# Altium PCB 400926.PcbDoc (part 1 of 7)
Units mm, origin at the board's own origin, x right, y up, seen from the top; angles counter-clockwise.
Board outline 148.5 x 63.5 mm, 4 copper layers (Top Layer, Mid-Layer 1, Mid-Layer 2, Bottom Layer), stack 1.514 mm thick; 311 components, 281 nets, 1495 pads, 2232 vias.
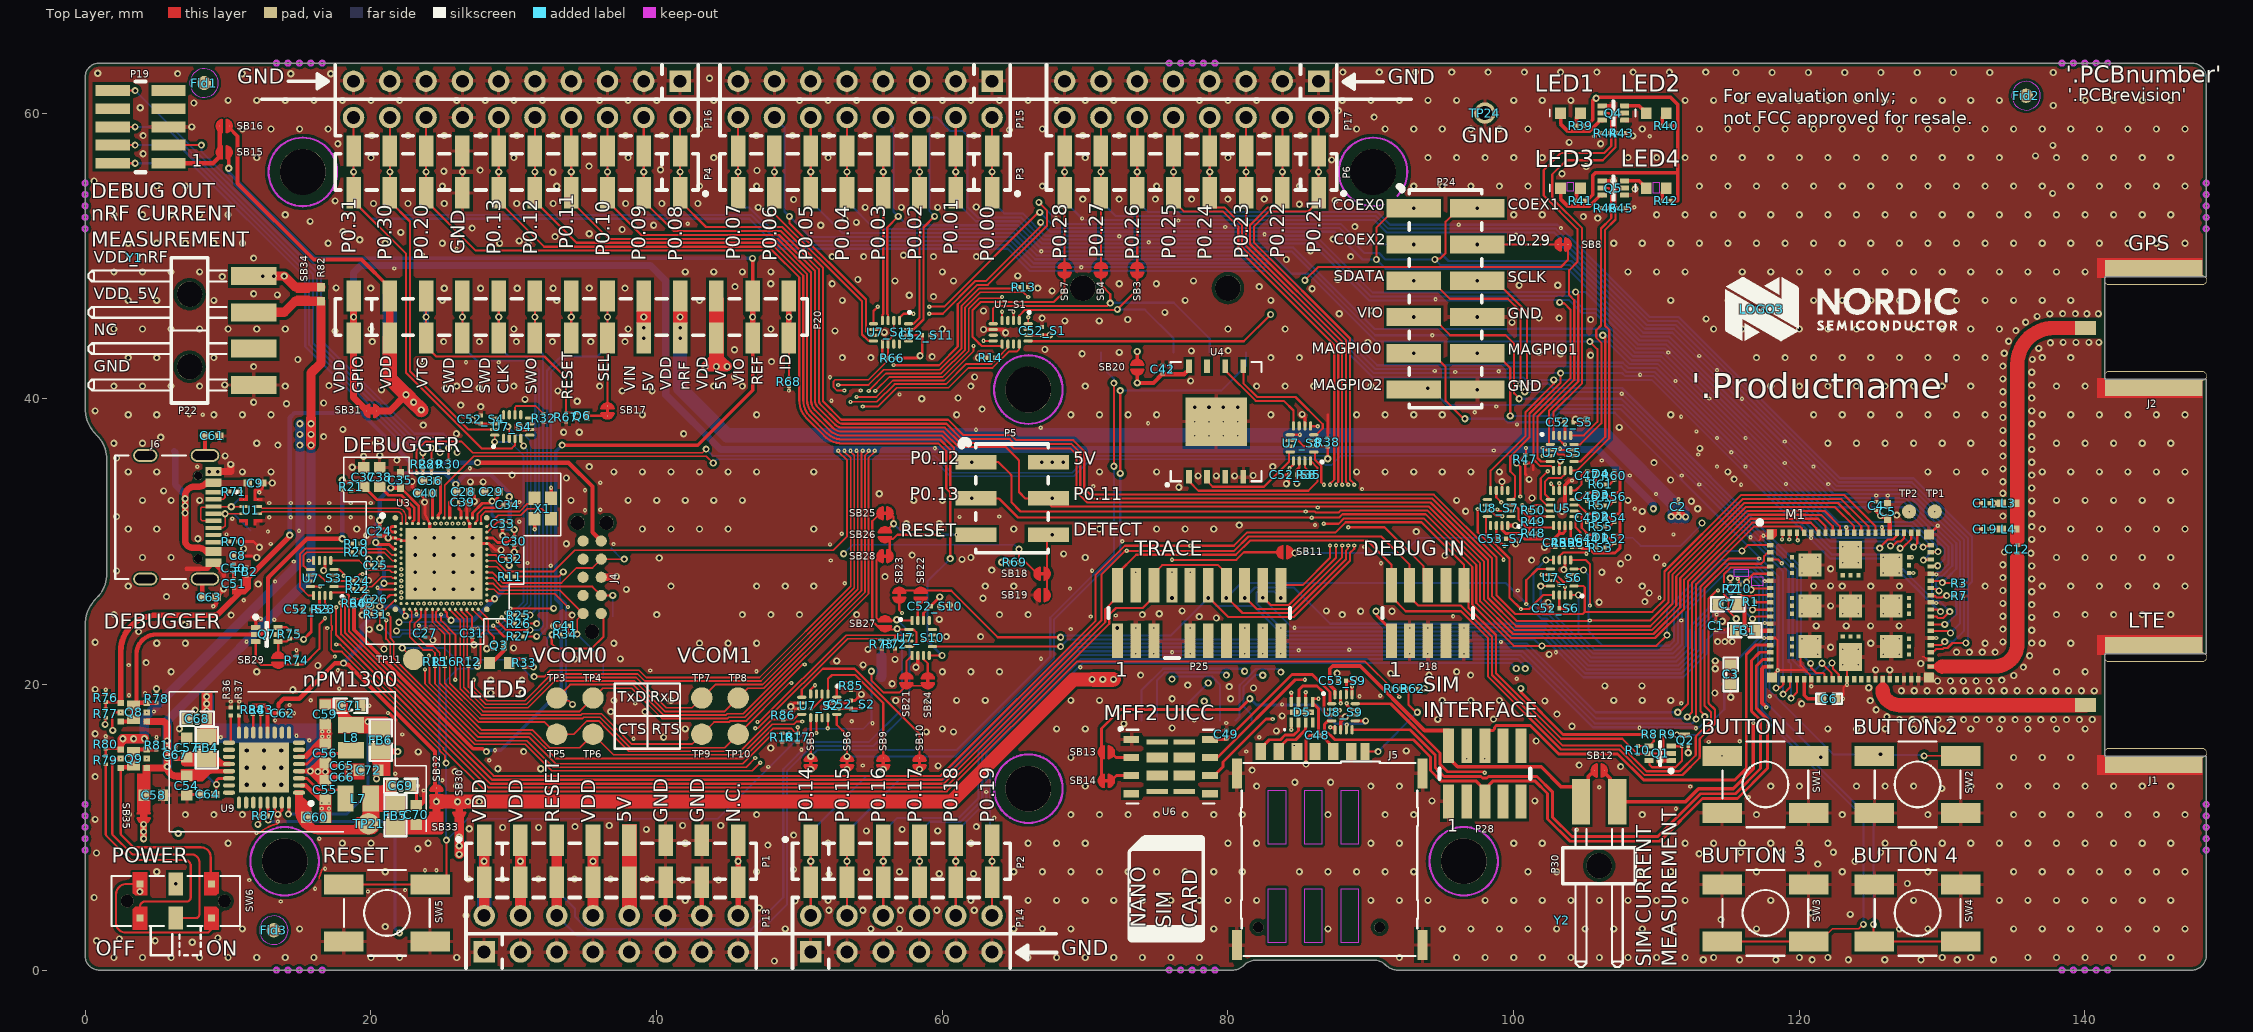
[diagram p0: Top Layer view]
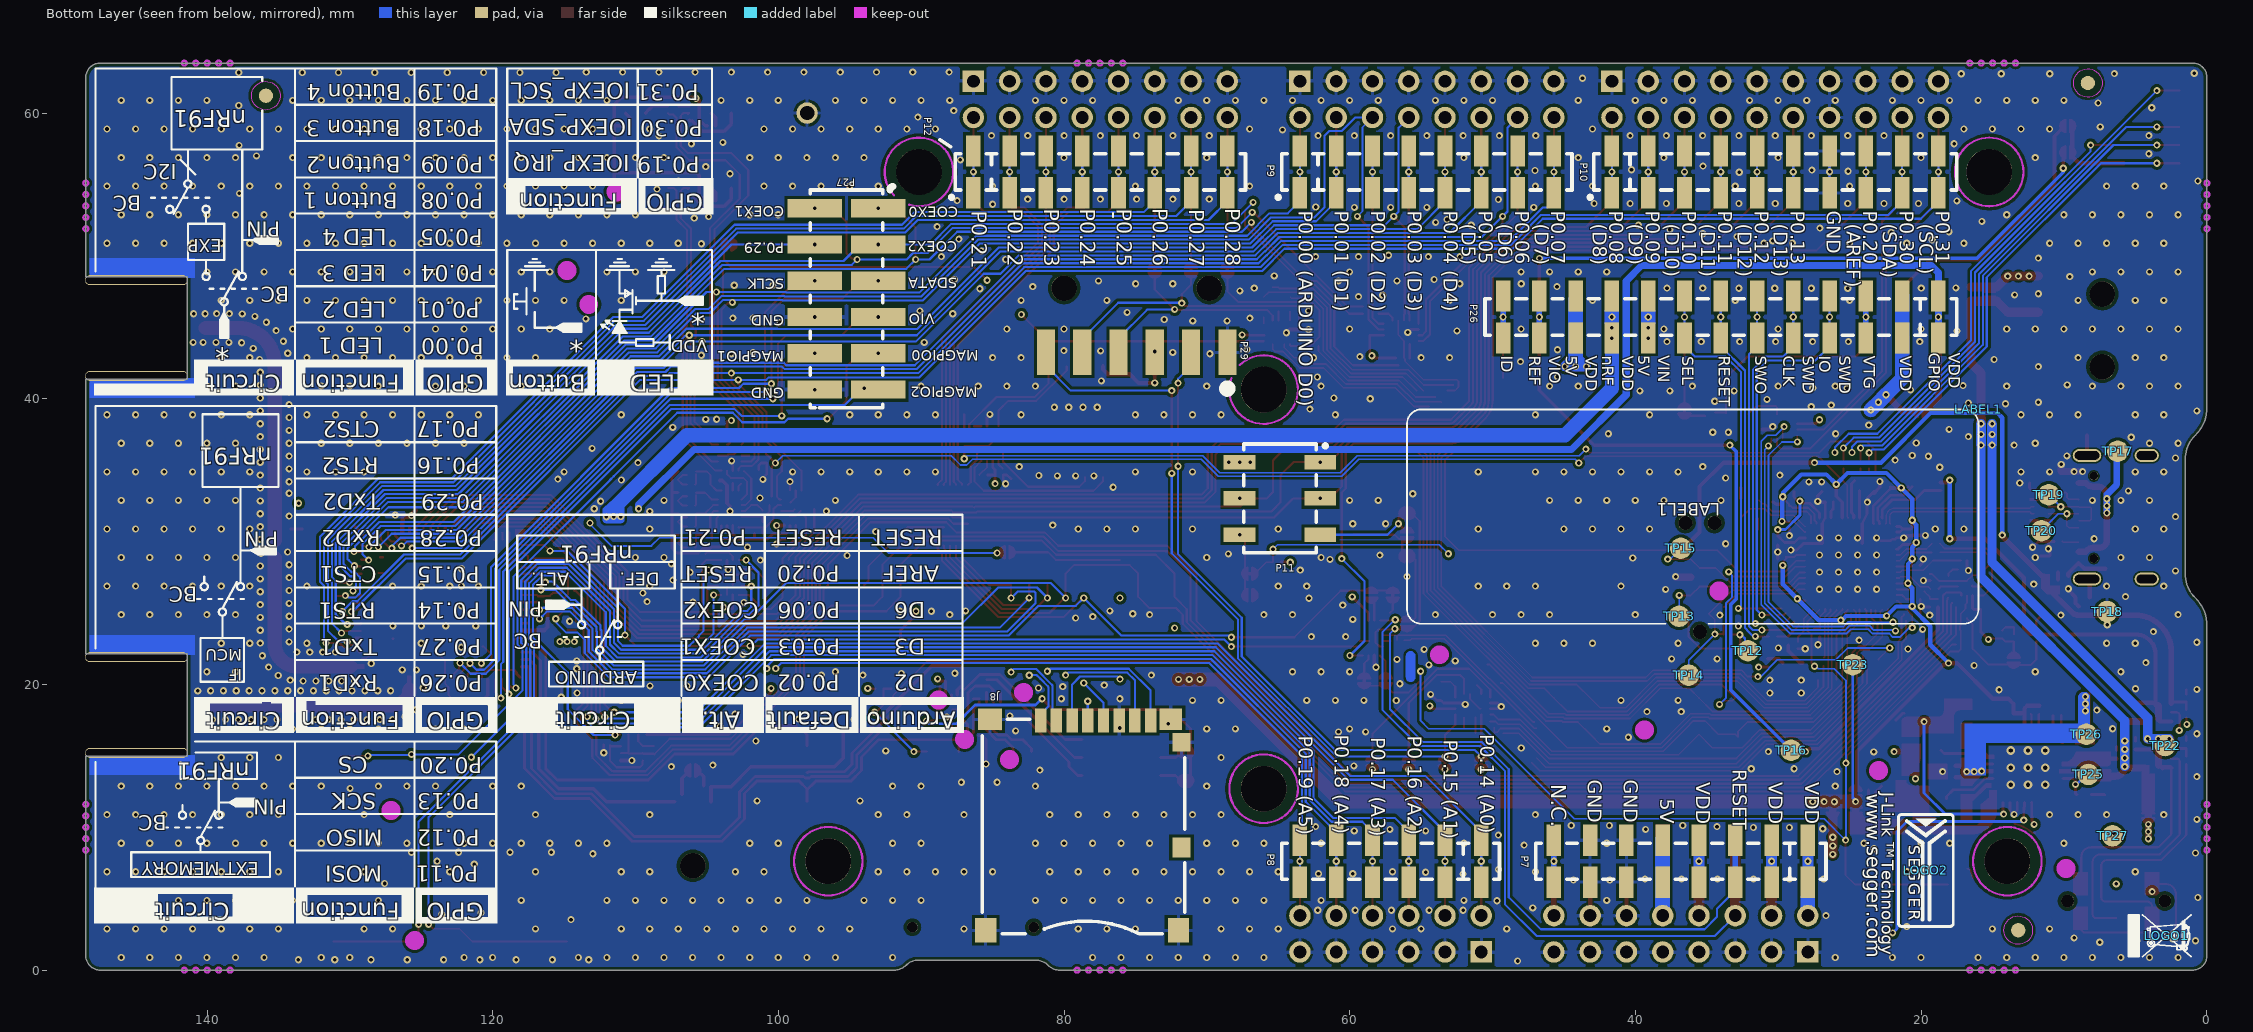
[diagram p1: Bottom Layer view, seen from below]
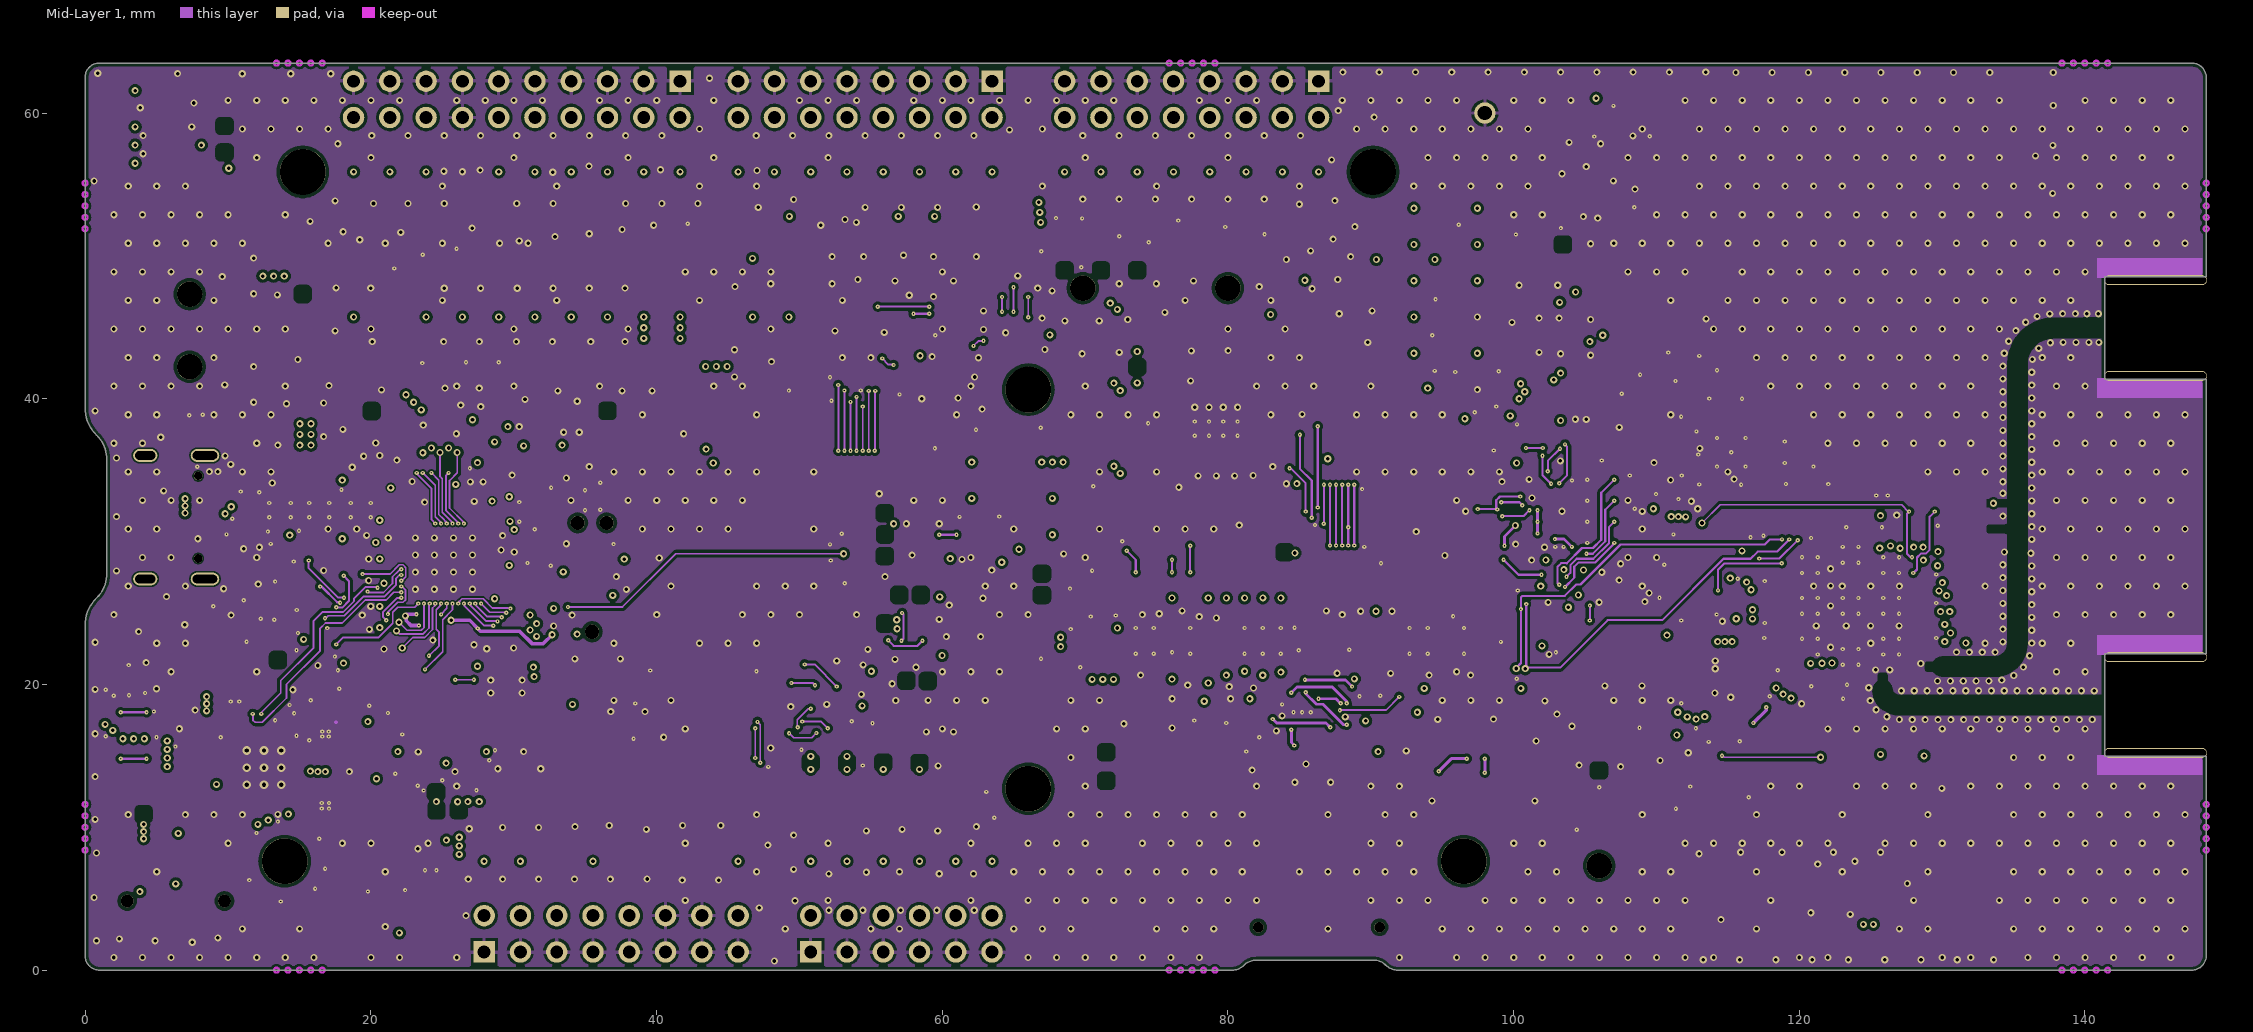
[diagram p2: Mid-Layer 1]
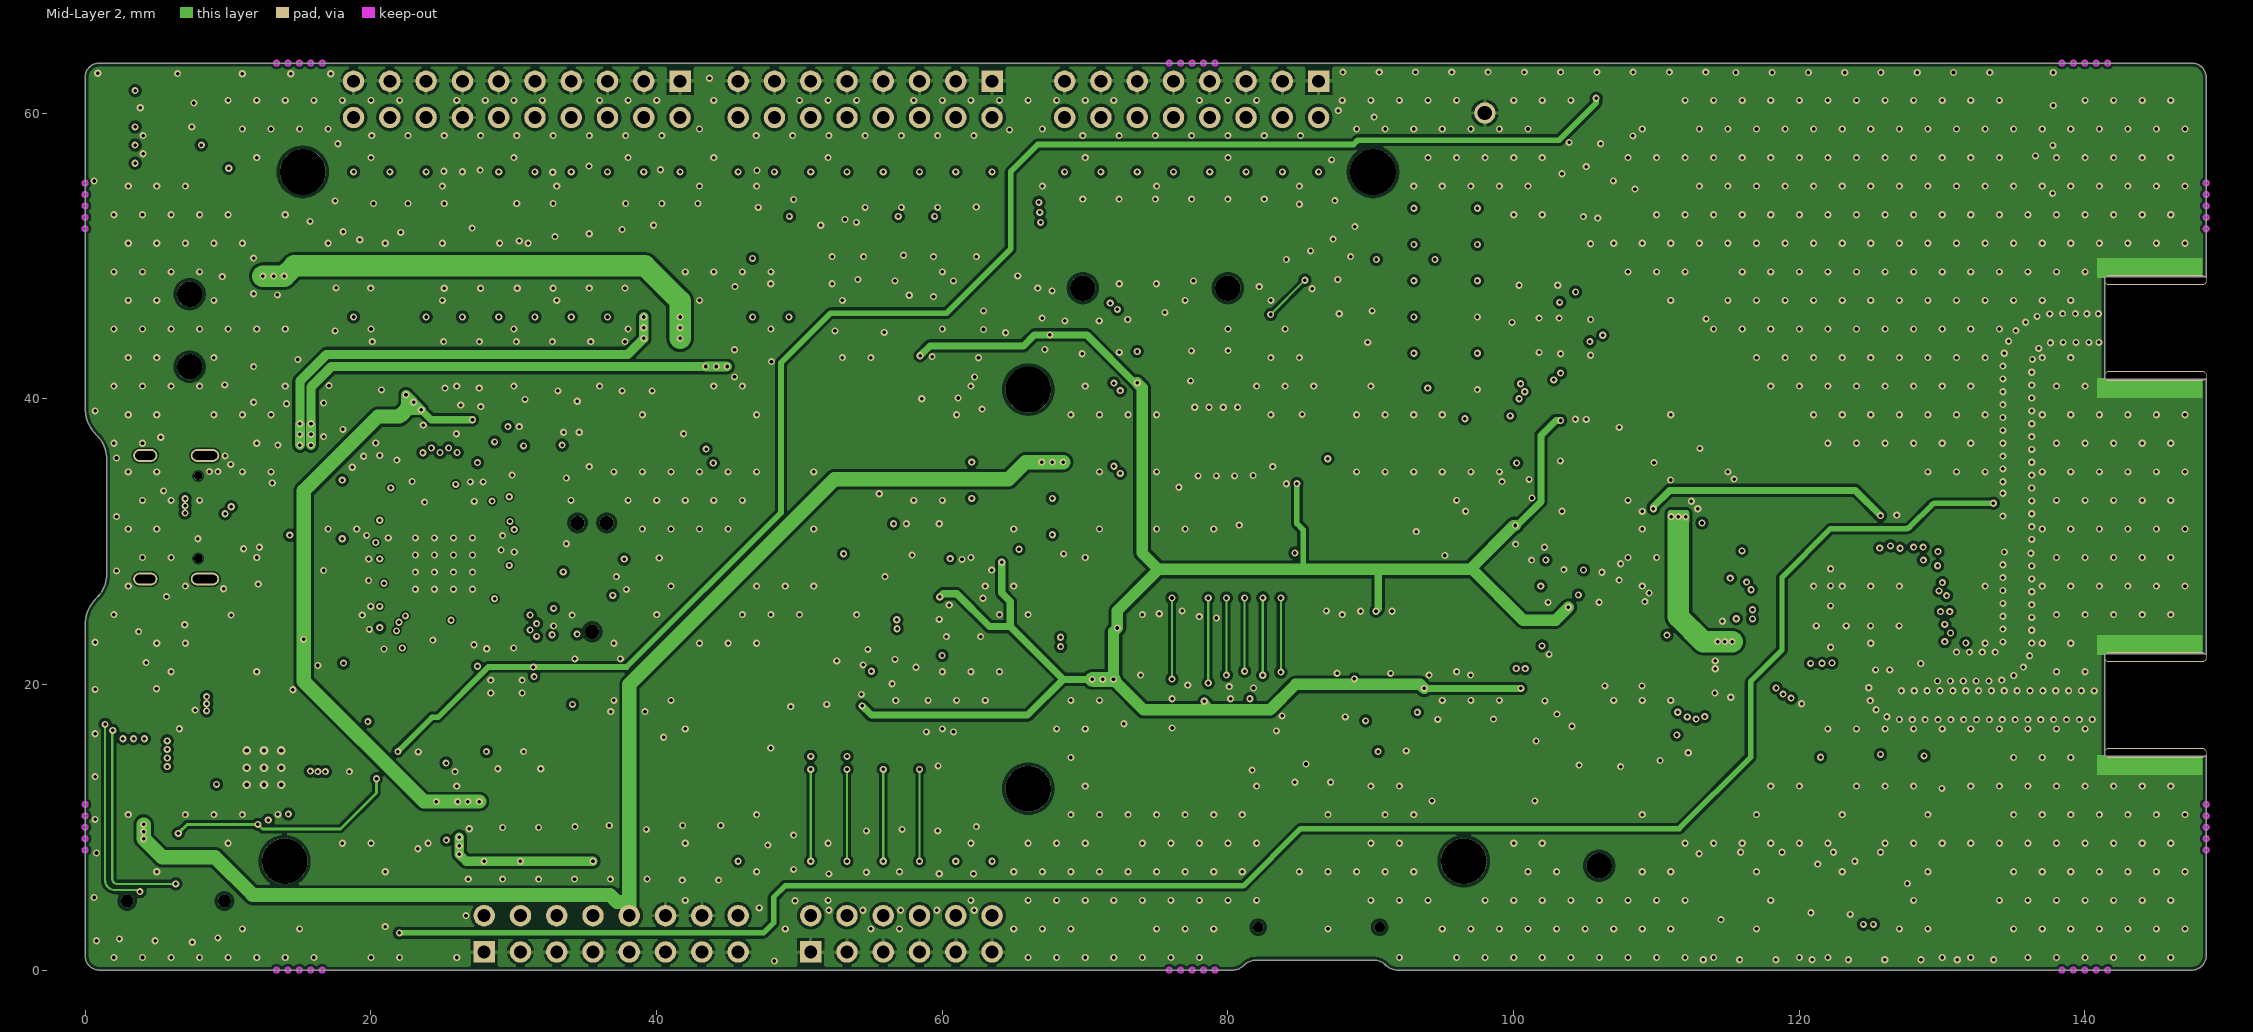
[diagram p3: Mid-Layer 2]
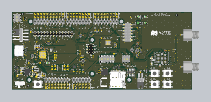
[diagram p9: 3D render of the assembled board from above, using the file's embedded part models]

## Layer stack, top to bottom
Top Solder: solder mask 0.05, Solder Resist Halogen-Free, Dk 3.5
Top Layer: signal copper 0.035
Dielectric1: prepreg 0.072, FR-4 Halogen-Free, Dk 4.18
Mid-Layer 1: signal copper 0.035
Dielectric2: core 1.23, FR-4 Halogen-Free, Dk 4.74
Mid-Layer 2: signal copper 0.035
Dielectric3: prepreg 0.072, FR-4 Halogen-Free, Dk 4.18
Bottom Layer: signal copper 0.035
Bottom Solder: solder mask 0.05, Solder Resist Halogen-Free, Dk 3.5

## Board outline
1,-0.001 cw(c1,0.999) 0,0.999 0,24.12 cw(c2.716,24.12) 0.796,26.041 0.962,26.207 ccw(c-0.876,27.75) 1.524,27.75 1.524,35.75 ccw(c-0.876,35.75) 0.962,37.293 0.796,37.459 cw(c2.716,39.38) 0,39.38 0,62.499 cw(c1,62.499) 1,63.499 147.5,63.499 cw(c147.5,62.499) 148.5,62.499 148.5,48.549 141.4,48.549 141.4,41.349 148.5,41.349 148.5,22.156 141.4,22.156 141.4,14.956 148.5,14.956 148.5,0.999 cw(c147.5,0.999) 147.5,-0.001 91.9,-0.001 cw(c91.9,1.179) 91.066,0.345 ccw(c90.231,-0.49) 90.231,0.69 81.969,0.69 ccw(c81.969,-0.49) 81.134,0.345 cw(c80.3,1.179) 80.3,-0.001

## Design rules (kind name [scope] priority, off if disabled: settings)
BoardOutlineClearance BoardOutlineClearance_SMA [HasFootprint('CONSMA024-G')] p1: gap=0 ignorepadtopadclearanceinfootprint=FALSE
BoardOutlineClearance [OnLayer('Top Layer') or OnLayer('Bottom Layer') or OnLayer('Mid-Layer 1') or OnLayer('Mid-Layer 2')] p2: gap=0.244 ignorepadtopadclearanceinfootprint=FALSE
Clearance SMA [HasFootprint('CONSMA024-G')] p1: gap=0 ignorepadtopadclearanceinfootprint=FALSE
Clearance USB_C [InComponent('J6')] p2: gap=0.1 ignorepadtopadclearanceinfootprint=FALSE
Clearance IMCU_room [WithinRoom('IMCU')] p3: gap=0.1 ignorepadtopadclearanceinfootprint=FALSE
Clearance USB_Poly_Clearance [(InNamedPolygon('Top_Layer-GND')) vs (IsTrack or IsArc) and (InDifferentialPair('D') or InDifferentialPair('USB0'))] p4 off: gap=1 ignorepadtopadclearanceinfootprint=FALSE
Clearance "NPTH clearance" [Not PadIsPlated And HoleSize > 0] p5: gap=0.23 ignorepadtopadclearanceinfootprint=FALSE
Clearance SB_Clearance [HasFootprint('Solderbridge') or HasFootprint('QFN40P180X140X55-10N')] p6: gap=0.127 ignorepadtopadclearanceinfootprint=FALSE except(0: Arc-Hole Track-Hole SMDPad-Hole THPad-Hole Via-Hole Fill-Hole Poly-Hole Region-Hole Text-Hole)
Clearance CSP_Clearance [HasFootprint('BGA4C40P2X2_76X76X62')] p7: gap=0.127 ignorepadtopadclearanceinfootprint=FALSE except(0: Arc-Hole Track-Hole SMDPad-Hole THPad-Hole Via-Hole Fill-Hole Poly-Hole Region-Hole Text-Hole)
Clearance P23_Clearance [HasFootprint('FPC_05P-0.5mm-RA-SMD')] p8: gap=0.127 ignorepadtopadclearanceinfootprint=FALSE except(0: Arc-Hole Track-Hole SMDPad-Hole THPad-Hole Via-Hole Fill-Hole Poly-Hole Region-Hole Text-Hole)
Clearance PSON35P100X50-8N_Clearance [HasFootprint('PSON35P100X50-8N')] p9: gap=0.15 ignorepadtopadclearanceinfootprint=FALSE except(0: Arc-Hole Track-Hole SMDPad-Hole THPad-Hole Via-Hole Fill-Hole Poly-Hole Region-Hole Text-Hole)
Clearance "Net tie_clearance" [InComponent('NT*') vs IsPad] p10: gap=0.001 ignorepadtopadclearanceinfootprint=TRUE
Clearance Polygon_Clearance [InNamedPolygon('Top_Layer-GND') or InNamedPolygon('Bottom_Layer-GND') or InNamedPolygon('Mid_Layer_1-GND') or InNamedPolygon('Mid_Layer_2-GND')] p11: gap=0.2 ignorepadtopadclearanceinfootprint=FALSE
Clearance Top_layer_Clearance [All vs OnLayer('Top Layer')] p12: gap=0.125 ignorepadtopadclearanceinfootprint=FALSE
Clearance USB_Clearance [InDifferentialPairClass('All Differential Pairs')] p13: gap=0.15 ignorepadtopadclearanceinfootprint=FALSE
Clearance RF_Clerance [InNet('RF') or InNet('ANT')] p14: gap=0.203 ignorepadtopadclearanceinfootprint=FALSE except(0: Arc-Hole Track-Hole SMDPad-Hole THPad-Hole Via-Hole Fill-Hole Poly-Hole Region-Hole Text-Hole)
Clearance [All] p15: gap=0.125 ignorepadtopadclearanceinfootprint=FALSE except(0: Poly-Region Region-Region)
ComponentClearance [All] p1 off: gap=0.254 collisioncheckmode=3 verticalgap=0.254 showdistances=FALSE
DiffPairsRouting [InDifferentialPairClass('All Differential Pairs')] p1: maxlimit=0.15 minlimit=0.127 mostfreqgap=0.15 toplayer_mingap=0.15 toplayer_minwidth=0.1 toplayer_maxwidth=0.1 toplayer_prefwidth=0.1 midlayer1_maxgap=0.127 midlayer1_prefgap=0.127 midlayer1_minwidth=0.054 midlayer1_maxwidth=0.054 midlayer1_prefwidth=0.054 midlayer2_maxgap=0.127 midlayer2_prefgap=0.127 midlayer2_minwidth=0.054 midlayer2_maxwidth=0.054 midlayer2_prefwidth=0.054 bottomlayer_mingap=0.15 bottomlayer_minwidth=0.1 bottomlayer_maxwidth=0.1 bottomlayer_prefwidth=0.1 impedanceprofiledriven=TRUE impedanceprofileid={5F1D737F-A6A0-4321-8E3C-81C77A155CAF} impedanceprofilevalue=90.000000 maxuncoupledlength=12.7
FabricationTestPointUsage TestPointUsage [All] p1: valid=0 allowmultiple=FALSE
FabricationTestpoint Testpoint [All] p1: side=3 testpointundercomponent=TRUE minsize=1.016 maxsize=2.54 preferedsize=1.524 minholesize=0 maxholesize=1.016 preferedholesize=0.813 testpointgrid=0.025 allowsidetop=TRUE allowsidebottom=TRUE usegrid=TRUE gridtolerance=0
Height [All] p1 off: minheight=0 maxheight=25.4 prefheight=12.7
HoleSize [All] p1: absolutevalues=TRUE maxlimit=10 minlimit=0.1 maxpercent=80.000 minpercent=20.000
HoleToHoleClearance [All] p1: gap=0.25 allowstackedmicrovias=FALSE
MaxMinImpedance [InNetClass('USB')] p1: minimum=81.00 maximum=99.00
MinimumAnnularRing [All] p1 off: minimumring=0.152
MinimumSolderMaskSliver USB-C [HasFootprint('SD-80259-001')] p1: minsoldermaskwidth=0
MinimumSolderMaskSliver PMIC [WithinRoom('nPM1300')] p2: minsoldermaskwidth=0
MinimumSolderMaskSliver [All] p3: minsoldermaskwidth=0.05
NetAntennae NetAntennae_ANT [InNet('ANT')] p1: netantennaetolerance=40
NetAntennae [All] p2: netantennaetolerance=0
PlaneClearance [All] p1: clearance=0.25
PlaneConnect [All] p1: planeconnectstyle=Direct reliefexpansion=0.508 reliefentries=4 reliefconductorwidth=0.254 reliefairgap=0.254
PolygonConnect VDD_nRF [InNet('VDD_nRF')] p1: connectstyle=Direct reliefconductorwidth=0.254 reliefentries=4 polygonreliefangle="90 Angle" airgapwidth=0.254
PolygonConnect VCC_and_VDD [InNet('NetC50_2') or InNet('NetC8_2') or InNet('NetC70_2') or InNet('VDD')] p2: connectstyle=Direct reliefconductorwidth=0.254 reliefentries=4 polygonreliefangle="90 Angle" airgapwidth=0.254
PolygonConnect GND_Poly [isVia and innet(gnd) or isVia and innet('VDD') or HasFootprint('COAXIAL-SWF') or isVia and innet('VDD_SAM') or InComponent('R80') or HasFootprint('COAXIAL RF U.FL-R-SMT-1') or HasFootprint('DSGP.1575.18') or HasFootprint('DX07S016JA1R1500') or InComponent('C65')or InComponent('C66')or InComponent('C72')] p3: connectstyle=Direct reliefconductorwidth=0.254 reliefentries=4 polygonreliefangle="90 Angle" airgapwidth=0.254
PolygonConnect General [All] p4: connectstyle=Relief reliefconductorwidth=0.25 reliefentries=4 polygonreliefangle="90 Angle" airgapwidth=0.2
RoomDefinition IMCU [InComponentClass('IMCU') vs False] p1: confinementstyle=ConfineIn formatcopy=TRUE lockcomponents=FALSE outline 18.088,33.042 18.088,34.655 18.67,34.655 18.67,36.018 21.455,36.018 21.455,35.513 22.755,35.513 22.755,34.943 25.405,34.943 25.405,34.163 27.705,34.163 29.68,34.163 29.68,33.843 33.38,33.843 33.38,30.782 30.586,30.782 30.586,29.226 30.581,29.226 30.581,28.246 28.954,28.246 28.954,24.429 27.636,24.429 27.636,22.776 24.279,22.776 24.279,20.47 21.721,20.47 21.721,24.429 20.321,24.429 20.321,25.421 19.543,25.421 19.543,27.797 19.543,33.008 18.67,33.008 18.67,33.042
RoomDefinition nPM1300 [InComponentClass('nPM1300') vs False] p2: confinementstyle=ConfineIn formatcopy=TRUE lockcomponents=FALSE outline 5.35,8.144 5.35,10.652 5.818,10.652 5.818,15.86 6.348,15.86 6.348,17.025 6.398,17.025 6.398,18.375 9.691,18.375 9.691,18.878 10.26,18.878 10.26,18.885 16.048,18.885 16.048,19.362 17.248,19.362 17.248,19.375 19.114,19.375 19.114,39.996 21.021,39.996 21.021,22.633 26.049,22.633 26.049,12.151 27.049,12.151 27.049,10.244 23.973,10.244 23.973,9.419 22.781,9.419 22.781,9.117 20.381,9.117 20.381,8.542 7.858,8.542 7.858,8.144
RoutingLayers RoutingLayers_1 [IsMicroVia] p1: top layer_v5=TRUE mid layer 1_v5=TRUE mid layer 2_v5=FALSE bottom layer_v5=FALSE
RoutingLayers [All] p2: top layer_v5=TRUE mid layer 1_v5=TRUE mid layer 2_v5=TRUE bottom layer_v5=TRUE
RoutingVias [All] p1: holewidth=0.25 width=0.5 viastyle="Through Hole" minholewidth=0.1 minwidth=0.3 maxholewidth=0.305 maxwidth=0.61
ShortCircuit "PVSS and GND" [InNet('PVSS1') or InNet('PVSS2') vs InNet('GND')] p1: allowed=TRUE
ShortCircuit ShortCircuit_1 [HasFootprint('P822601')] p2: allowed=TRUE
ShortCircuit [All] p3: allowed=FALSE
SilkToSilkClearance [All] p1: silktosilkclearance=0.15
SilkToSolderMaskClearance SilkscreenOverComponentPads [IsPad] p1: minsilkscreentomaskgap=0.254 clearancetoexposedcopper=TRUE
SolderMaskExpansion SolderMaskExpansion_Via [IsVia] p1: expansion=0.102 istentingtop=TRUE
SolderMaskExpansion SolderMaskExpansion_USB [HasFootprint('L-KLS1-5473')] p2: expansion=0.06 istentingtop=FALSE
SolderMaskExpansion [All] p3: expansion=0.076 istentingtop=FALSE
SupplyNets "Schematic Supply Nets_19" [InNet('VDD_1V8')] p1: voltage=0.000
SupplyNets "Schematic Supply Nets_18" [InNet('VBUSOUT')] p2: voltage=0.000
SupplyNets "Schematic Supply Nets_17" [InNet('VDD')] p3: voltage=0.000
SupplyNets "Schematic Supply Nets_16" [InNet('VBUS')] p4: voltage=0.000
SupplyNets "Schematic Supply Nets_15" [InNet('VIN')] p5: voltage=0.000
SupplyNets "Schematic Supply Nets_14" [InNet('GND')] p6: voltage=0.000
SupplyNets "Schematic Supply Nets_13" [InNet('VIOEXT')] p7: voltage=0.000
SupplyNets "Schematic Supply Nets_12" [InNet('5V')] p8: voltage=0.000
SupplyNets "Schematic Supply Nets_11" [InNet('VIO_REF')] p9: voltage=0.000
SupplyNets "Schematic Supply Nets_10" [InNet('VIN_5V')] p10: voltage=0.000
SupplyNets "Schematic Supply Nets_9" [InNet('VDD_IMCU')] p11: voltage=0.000
SupplyNets "Schematic Supply Nets_8" [InNet('VIO')] p12: voltage=0.000
SupplyNets "Schematic Supply Nets_7" [InNet('VDD_3V0')] p13: voltage=0.000
SupplyNets "Schematic Supply Nets_6" [InNet('VIN:5V')] p14: voltage=0.000
SupplyNets "Schematic Supply Nets_5" [InNet('FB2:VBUS')] p15: voltage=0.000
SupplyNets "Schematic Supply Nets_4" [InNet('VDD_nRF')] p16: voltage=0.000
SupplyNets "Schematic Supply Nets_3" [InNet('VDD_GNSS')] p17: voltage=0.000
SupplyNets "Schematic Supply Nets_2" [InNet('VDD_5V')] p18: voltage=0.000
SupplyNets "Schematic Supply Nets_1" [InNet('VSYS')] p19: voltage=0.000
SupplyNets "Schematic Supply Nets" [InNet('VDD_GPIO')] p20: voltage=0.000
UnpouredPolygon [All] p1 off:
Width Width_RF [InNet('ANT') or InNet('LTE_RF1') or InNet('GPS_RF1')] p1: maxlimit=1.008 minlimit=0.1 preferedwidth=1.008 toplayer_minwidth=1 bottomlayer_minwidth=1 impedanceprofiledriven=TRUE impedanceprofileid={28F3A609-7DB3-45B1-BB45-39A827C1017D} impedanceprofilevalue=50.000000 minimp=50.000000 maximp=50.000000 favimp=50.000000
Width Width_Diff [(InDifferentialPairClass('All Differential Pairs'))] p2: maxlimit=0.165 minlimit=0.1 preferedwidth=0.165 toplayer_maxwidth=0.1 toplayer_prefwidth=0.1 bottomlayer_maxwidth=0.1 bottomlayer_prefwidth=0.1 minimp=50.000000 maximp=50.000000 favimp=50.000000
Width Width_GPIO [InNetClass('GPIO')] p3: maxlimit=0.152 minlimit=0.125 preferedwidth=0.15 minimp=50.000000 maximp=50.000000 favimp=50.000000
Width Width_GPIO_1 [InNetClass('COEX')] p4: maxlimit=0.152 minlimit=0.125 preferedwidth=0.15 minimp=50.000000 maximp=50.000000 favimp=50.000000
Width Width_GPIO_2 [InNetClass('SWD')] p5: maxlimit=0.152 minlimit=0.125 preferedwidth=0.15 minimp=50.000000 maximp=50.000000 favimp=50.000000
Width Width_GPIO_3 [InNetClass('UART')] p6: maxlimit=0.152 minlimit=0.125 preferedwidth=0.15 minimp=50.000000 maximp=50.000000 favimp=50.000000
Width [All] p7: maxlimit=2.54 minlimit=0.125 preferedwidth=0.15
14 further rules are at their usual default settings.

## Classes and differential pairs
channel class pca10201_switch_nx: S7 S9
channel class pca10201_switch_fsa: S1 S2 S3 S4 S5 S6 S8 S10 S11
differential pair class IMCU: D
differential pair class D:J6: D:J6
net class USB: D:J6_N D:J6_P D_N D_P
net class VCOM: VCOM0_CTRL VCOM0_CTS VCOM0_HWFC VCOM0_RTS VCOM0_RXD VCOM0_TXD VCOM1_CTRL VCOM1_CTS VCOM1_HWFC VCOM1_RTS VCOM1_RXD VCOM1_TXD
net class nRF9151_UART: P0.14/AIN1 P0.15/AIN2 P0.16/AIN3 P0.17/AIN4 P0.26 P0.27 P0.28 P0.29
net class EXT_MEM: P0.11 P0.12 P0.13/AIN0 P0.20/AIN7
component class IMCU: C24 C25 C26 C27 C28 C29 C30 C31 C32 C33 C34 C35 C36 C37 C38 C39 C40 R21 TP11 U3 X1
component class nPM1300: C54 C55 C56 C57 C59 C60 C62 C64 C65 C66 C67 C68 C69 C70 C71 C72 FB4 FB5 FB6 L7 L8 R36 R37 R87 SB30 SB31 SB32 SB33 TP21 TP23 TP25 TP26 TP27 U9
net class RF: GPS_RF1 GPS_RF2 LTE_RF1
net class SWD: P0.22 RESET SWD0_CLK SWD0_IO SWD0_RESET SWD0_SEL SWD0_SWO SWD1_CLK SWD1_IO SWD1_RESET SWD1_SEL SWD1_SWO SWD3_CLK SWD3_IO SWD3_RESET SWD3_SWO SWD_CTRL SWDCLK SWDIO
net class COEX: COEX0 COEX1 COEX2 MAGPIO0 MAGPIO1 MAGPIO2 MIPI_SCLK MIPI_SDATA MIPI_VIO
net class GPIO: AREF BTN1_EXT BTN2_EXT BTN3_EXT BTN4_EXT BUTTON1 BUTTON2 BUTTON3 BUTTON4 COEX0 COEX1 COEX2 COEX_SELECT COM.CH1_S1 COM.CH2_S2 COM.CH3_S1 COM.CH4_S2 EXT_MEM_C\S\ EXT_MEM_CTRL EXT_MEM_MISO EXT_MEM_MOSI EXT_MEM_SCK IMCU_LED IMCU_SCL IMCU_SDA INT_EXT IOEXP_CTRL LED1 LED1_EXT LED2 LED2_EXT LED3 LED3_EXT LED4 LED4_EXT MAGPIO0 MAGPIO1 MAGPIO2 MIPI_SCLK MIPI_SDATA MIPI_VIO NC.CH1_S3 NC.CH3_S3 NC.CH4_S3 NetC44_1 NetC45_2 NetC46_2 NetC47_2 NetR51_1 NetR58_1 NO.CH1_S8 P0.00 P0.01 P0.02 P0.03 P0.04 P0.05 P0.06 P0.07 P0.08 P0.09 P0.10 P0.11 P0.12 P0.13/AIN0 P0.14/AIN1 P0.15/AIN2 P0.16/AIN3 P0.17/AIN4 P0.18/AIN5 P0.19/AIN6 P0.20/AIN7 P0.21 P0.22 P0.23 P0.24 P0.25 P0.26 P0.27 P0.28 P0.29 P0.30 P0.31 RESET RESET_BUTTON RESET_IN_CTRL RESET_OUT_CTRL SCL_EXT SDA_EXT SHIELD_DETECT SIM_SELECT SWD0_CLK SWD0_IO SWD0_RESET SWD0_SEL SWD0_SWO SWD1_CLK SWD1_IO SWD1_RESET SWD1_SEL SWD1_SWO SWD3_CLK SWD3_IO SWD3_RESET SWD3_SWO SWD_CTRL SWDCLK SWDIO TGT_SCL TGT_SDA TGT_TWI_CTRL UART1.CTS UART1.RTS UART1.RXD UART1.TXD UART2.CTS UART2.RTS UART2.RXD UART2.TXD USB_DETECT VCOM0_CTRL VCOM0_CTS VCOM0_HWFC VCOM0_RTS VCOM0_RXD VCOM0_TXD VCOM1_CTRL VCOM1_CTS VCOM1_HWFC VCOM1_RTS VCOM1_RXD VCOM1_TXD VIO_REF_SENSE
differential pair D: +D_P -D_N
differential pair D:J6: +D:J6_P -D:J6_N

## Components (designator, comment, footprint, x,y, rotation, side; value= is the part's Value field where it differs from the comment)
C1 "1.0µF" CAPC0603X03L_C 114.19,24.099 r90 top
C2 "1.0µF" CAPC0603X03L_C 111.55,32.424 r90 top
C3 "10µF" CAPC1608X06L 115.2,20.699 r270 top
C4 "100nF" CAPC0603X03L_C 125.4,32.499 r90 top
C5 "4.7µF" CAPC1005X04L 126.2,32.099 r90 top
C6 "4.7µF" CAPC1005X04L 122.1,18.999 r0 top
C7 "10µF" CAPC1608X06L 115,25.599 r180 top
C8 "100nF" CAPC0603X03L_C 10.7,28.999 r180 top
C9 "1.0µF" CAPC1005X04L 11.9,34.099 r180 top
C10 "100nF" CAPC0603X03L_C 115.8,26.699 r90 top
C11 "39pF" CAPC0603X03L_C 133.03,32.679 r0 top
C12 "39pF" CAPC0603X03L_C 135.28,29.479 r270 top
C19 "N.C." CAPC0603X03L_C_NC 133.03,30.879 r0 top
C24 "100nF" CAPC0603X03L_C 20.625,30.708 r90 top
C25 "100nF" CAPC0603X03L_C 20.35,28.333 r0 top
C26 "100nF" CAPC0603X03L_C 20.35,25.958 r180 top
C27 "100nF" CAPC0603X03L_C 23.827,23.583 r90 top
C28 "1.0µF" CAPC1005X04L 26.475,33.483 r0 top
C29 "1.0µF" CAPC1005X04L 28.45,33.483 r0 top
C30 "2.2nF" CAPC0603X03L_C 30.05,30.033 r270 top
C31 "100nF" CAPC0603X03L_C 27.1,23.583 r90 top
C32 "100nF" CAPC0603X03L_C 29.775,28.783 r180 top
C33 "100nF" CAPC0603X03L_C 29.225,31.233 r90 top
C34 "100nF" CAPC0603X03L_C 29.575,32.574 r0 top
C35 "1.0µF" CAPC1005X04L 22.075,34.283 r270 top
C36 "1.0µF" CAPC1005X04L 24.175,34.263 r0 top
C37 "4.7µF" CAPC1608X06L 19.5,34.513 r90 top
C38 "4.7µF" CAPC1608X06L 20.625,34.513 r90 top
C39 "100nF" CAPC0603X03L_C 26.444,32.758 r0 top
C40 "1.0µF" CAPC1005X04L 23.825,33.388 r0 top
C41 "10nF" CAPC0603X03L_C 33.625,24.099 r0 top
C42 "100nF" CAPC0603X03L_C 75.45,42.049 r270 top
C43 "100nF" CAPC0603X03L_C 102.927,29.911 r90 top
C44 "1.0µF" CAPC0603X03L_C 105.174,30.19 r270 top
C45 "1.0µF" CAPC0603X03L_C 105.174,31.663 r90 top
C46 "1.0µF" CAPC0603X03L_C 105.174,33.136 r90 top
C47 "1.0µF" CAPC0603X03L_C 105.174,34.61 r90 top
C48 "10nF" CAPC0603X03L_C 86.275,16.424 r180 top
C49 "N.C." CAPC0603X03L_C_NC 79.9,16.499 r270 top
C50 "10nF" CAPC0603X03L_C 10.425,28.149 r90 top
C51 "100nF" CAPC0603X03L_C 10.425,27.049 r270 top
C52_S1 "100nF" CAPC0603X03L_C 67,44.749 r90 top (schematic designator C52)
C52_S2 "100nF" CAPC0603X03L_C 53.625,18.599 r90 top (schematic designator C52)
C52_S3 "100nF" CAPC0603X03L_C 15.55,25.249 r180 top (schematic designator C52)
C52_S4 "100nF" CAPC0603X03L_C 27.7,38.549 r90 top (schematic designator C52)
C52_S5 "100nF" CAPC0603X03L_C 103.898,38.358 r0 top (schematic designator C52)
C52_S6 "100nF" CAPC0603X03L_C 102.923,25.333 r180 top (schematic designator C52)
C52_S8 "100nF" CAPC0603X03L_C 84.553,34.67 r180 top (schematic designator C52)
C52_S10 "100nF" CAPC0603X03L_C 59.5,25.474 r0 top (schematic designator C52)
C52_S11 "100nF" CAPC0603X03L_C 58.9,44.449 r0 top (schematic designator C52)
C53_S7 "100nF" CAPC0603X03L_C 99.197,30.191 r0 top (schematic designator C53)
C53_S9 "100nF" CAPC0603X03L_C 88,20.249 r180 top (schematic designator C53)
C54 "1.0µF" CAPC1608X06L 7.127,12.921 r90 top
C55 "10µF" CAPC1608X06L 16.827,12.621 r90 top
C56 "10µF" CAPC1608X06L 16.827,15.171 r270 top
C57 "10µF" CAPC1608X06L 7.127,15.571 r270 top
C58 "4.7µF" CAPC1608X06L 4.795,12.242 r180 top
C59 "10µF" CAPC1608X06L 16.827,17.908 r90 top
C60 "10µF" CAPC1608X06L 16.15,10.699 r180 top
C61 "10nF" CAPC1005X04L 8.9,37.399 r0 top
C62 "100nF" CAPC0603X03L_C 13.825,17.974 r0 top
C63 "10nF" CAPC1005X04L 8.7,26.099 r0 top
C64 "1.0µF" CAPC1005X04L 8.6,12.299 r0 top
C65 "1.0nF" CAPC0603X03L_C 18.012,14.296 r180 top
C66 "1.0nF" CAPC0603X03L_C 18.012,13.496 r180 top
C67 "1.0nF" CAPC0603X03L_C 6.327,15.081 r270 top
C68 "N.C." CAPC1608X06L_NC 7.852,17.596 r0 top
C69 "N.C." CAPC1608X06L_NC 22.102,12.896 r180 top
C70 "100nF" CAPC1608X06L 23.194,10.873 r270 top
C71 "N.C." CAPC1608X06L_NC 18.581,18.504 r180 top
C72 "100nF" CAPC1608X06L 19.852,13.996 r0 top
D1 "CFSH05-20L" SODFL35X40-2N 106.114,30.317 r180 top
D2 "CFSH05-20L" SODFL35X40-2N 106.114,31.79 r180 top
D3 "CFSH05-20L" SODFL35X40-2N 106.114,33.263 r180 top
D4 "CFSH05-20L" SODFL35X40-2N 106.114,34.737 r180 top
D5 "TPD3F303DPVR" SON50P210X160X65_HS-9N 85.2,18.049 r90 top
FB1 "22R@100M/6A" INDC1608X06L 116.2,23.799 r0 top
FB2 "120R/0.9A" INDC0603X03L_C 11.3,27.899 r270 top
FB4 "0R" RESC2012X11L 8.527,15.571 r90 top
FB5 "0R" RESC2012X11L 21.727,10.821 r270 top
FB6 "0R" RESC2012X11L 20.7,16.099 r270 top
Fid1 "Fiducial mark" Fiducial 8.335,62.103 r0 top value=N.A.
Fid2 "Fiducial mark" Fiducial 135.89,61.213 r0 top value=N.A.
Fid3 "Fiducial mark" Fiducial 13.208,2.794 r0 top value=N.A.
J1 "SMA Edge" CONSMA024-G 144.95,18.556 r270 top
J2 "SMA Edge" CONSMA024-G 144.95,44.949 r270 top
J4 "TC2050-IDC" TC2050-IDC-NLFP 35.5,27.499 r90 top
J5 "KLS1-SIM-066" KLS1-SIM-066 82.3,15.299 r0 top
J6 "USB-C 2.0" SD-80259-001 6.6,31.704 r270 top
J8 "microSD Card Connector" Molex_502774-0891 72.75,17.549 r0 bottom locked
L3 "68nH" INDC1005X04L_WW 134.63,32.679 r0 top
L4 "N.C." INDC1005X04L_NC 134.63,30.879 r180 top
L7 "2.2µH" INDC2016X10N 19.112,11.996 r180 top
L8 "2.2µH" INDC2016X10N 18.625,16.274 r270 top
LABEL1 "15x40mm" LabelSilk_15x40 16,39.25 r0 bottom
LED1 "L0603G" LED_0603_G 104,59.999 r0 top
LED2 "L0603G" LED_0603_G 110,59.999 r0 top
LED3 "L0603G" LED_0603_G 104,54.749 r0 top
LED4 "L0603G" LED_0603_G 110,54.749 r0 top
LED5 "L0603G" LED_0603_G 29,21.499 r0 top
LOGO1 "WEE Symbol" WEEE_3x4.5mm 2.8,2.4 r270 bottom
LOGO2 "Segger Logo S" SEGGER_LOGO_S 19.675,6.975 r270 bottom
LOGO3 "Nordic Logo" NORDIC_LOGO_LYING 117.4,46.274 r0 top
M1 "nRF9151-LACAA1A" LGA50P1210X1110X130-113N 123.6,25.499 r270 top
P1 "Socket 1x8" SOCKET_1x8_SMD 27.94,7.62 r0 top
P2 "Socket 1x6" SOCKET_1x6_SMD 50.8,7.62 r0 top
P3 "Socket 1x8" SOCKET_1x8_SMD 63.5,55.88 r180 top
P4 "Socket 1x10" SOCKET_1x10_SMD 41.656,55.88 r180 top
P5 "Pin Hdr 2x3" HDR_2x3-SMD 64.897,33.02 r270 top
P6 "Socket 1x8" SOCKET_1x8_SMD 86.36,55.88 r180 top
P7 "Pin List 1x8" LIST_1x8_SMD-NC 27.94,7.62 r0 bottom
P8 "Pin List 1x6" LIST_1x6_SMD-NC 50.8,7.62 r0 bottom
P9 "Pin List 1x8" LIST_1x8_SMD-NC 63.5,55.88 r180 bottom
P10 "Pin List 1x10" LIST_1x10_SMD-NC 41.656,55.88 r180 bottom
P11 "Socket 2x3" SOCKET_2x3_SMD-2.54mm-NC 64.897,33.02 r90 bottom
P12 "Pin List 1x8" LIST_1x8_SMD-NC 86.36,55.88 r180 bottom
P13 "Pin Header 2x8" HDR_2x8-NC 36.83,2.54 r0 top
P14 "Pin Header 2x6" HDR_2x6-NC 57.15,2.54 r0 top
P15 "Pin Header 2x8" HDR_2x8-NC 54.61,60.96 r180 top
P16 "Pin Header 2x10" HDR_2x10-NC 30.226,60.96 r180 top
P17 "Pin Header 2x8" HDR_2x8-NC 77.47,60.96 r180 top
P18 "Pin Header 2x5, 1.27mm" HDR_2x5-SMD-1.27mm-K 94,24.999 r0 top
P19 "Pin Header 2x5, 1.27mm" HDR_2x5-SMD-1.27mm-K 3.886,59.03 r90 top
P20 "Pin List 1x13" LIST_1x13_SMD 18.796,45.72 r0 top
P22 "Pin List 1x4, Angled" LIST_ANG_1x4-SMD-2.54MM 11.811,44.778 r270 top
P24 "Socket 2x6" SOCKET_2x6_SMD-2.54mm#1 95.25,46.99 r270 top
P25 "Pin Header 2x10, 1.27mm, SWD" HDR_2x10-SMD-1.27mm-K-SWD 78,24.999 r0 top
P26 "Socket 1x13" LIST_1x13_SMD-NC 18.796,45.72 r0 bottom
P27 "Socket 2x6" SOCKET_2x6_SMD-2.54mm#2 95.25,46.99 r270 bottom
P28 "Pin Header 2x5, 1.27mm" HDR_2x5-SMD-1.27mm 98,13.749 r0 top
P29 "Pin List 1x6, Angled" LIST_ANG_1x6-SMD-2.54MM 74.93,43.249 r0 bottom
P30 "Pin List 1x2, Angled" LIST_ANG_1x2-SMD-2.54MM 106,11.799 r0 top
Q1 "DMC2400UV" SOTFL50P162X60-6N 110.265,15.174 r180 top
Q2 "RV2C010UNT2L" DFN65P100X40-3L 112.015,16.099 r90 top
Q3 "RV2C010UNT2L" DFN65P100X40-3L 28.975,22.724 r0 top
Q4 "UM6X1NA" SOTFL50P162X60-6N 107,59.999 r180 top
Q5 "UM6X1NA" SOTFL50P162X60-6N 107,54.749 r180 top
Q6 "RV2C010UNT2L" DFN65P100X40-3L 34.775,38.799 r0 top
Q7 "DMC2400UV" SOTFL50P162X60-6N 12.725,23.499 r0 top
Q8 "MCM2301-TP" DFN65P200X200X80_HS-6N 3.4,18.049 r0 top
Q9 "MCM2301-TP" DFN65P200X200X80_HS-6N 3.4,14.799 r0 top
R1 "10k" RESC0603X03L_C 116.6,25.799 r0 top
R2 "1k" RESC0603X03L_C 115.2,26.699 r270 top
R3 "1M0" RESC0603X03L_C 131.2,27.099 r180 top
R7 "1M0" RESC0603X03L_C 131.2,26.199 r180 top
R8 "10k" RESC0603X03L_C 109.54,16.499 r0 top
R9 "N.C." RESC0603X03L_C_NC 110.815,16.499 r0 top
R10 "100k" RESC0603X03L_C 108.715,15.399 r90 top
R11 "150R" RESC0603X03L_C 29.775,27.549 r0 top
R12 "150R" RESC0603X03L_C 26.85,21.583 r270 top
R13 "1M0" RESC0603X03L_C 65.725,47.799 r0 top
R14 "1M0" RESC0603X03L_C 63.4,42.874 r0 top
R15 "150R" RESC0603X03L_C 24.5,21.583 r270 top
R16 "150R" RESC0603X03L_C 25.175,21.583 r270 top
R17 "1M0" RESC0603X03L_C 49.9,16.299 r270 top
R18 "1M0" RESC0603X03L_C 48.8,16.299 r90 top
R19 "150R" RESC0603X03L_C 18.975,29.858 r180 top
R20 "150R" RESC0603X03L_C 18.975,29.258 r180 top
R21 "2R2" RESC0603X03L_C 18.625,33.849 r270 top
R22 "150R" RESC0603X03L_C 19.075,26.683 r180 top
R23 "N.C." RESC0603X03L_C_NC 16.675,25.249 r180 top
R24 "1M0" RESC0603X03L_C 19.075,27.274 r180 top
R25 "150R" RESC0603X03L_C 30.375,24.858 r0 top
R26 "150R" RESC0603X03L_C 30.375,24.258 r0 top
R27 "150R" RESC0603X03L_C 30.375,23.358 r0 top
R28 "150R" RESC0603X03L_C 23.65,35.408 r90 top
R29 "150R" RESC0603X03L_C 24.25,35.408 r90 top
R30 "150R" RESC0603X03L_C 25.45,35.408 r90 top
R31 "1M0" RESC0603X03L_C 20.35,24.924 r180 top
R32 "1M0" RESC0603X03L_C 32.1,38.649 r90 top
R33 "120R" RESC0603X03L_C 30.75,21.499 r270 top
R34 "100k" RESC0603X03L_C 33.625,23.499 r180 top
R35 "100k" RESC0603X03L_C 85.653,34.67 r180 top
R36 "47k" RESC0603X03L_C 10.2,18.099 r90 top
R37 "150k" RESC0603X03L_C 10.769,18.106 r90 top
R38 "1M0" RESC0603X03L_C 87.003,36.945 r270 top
R39 "120R" RESC0603X03L_C 104.698,59.117 r0 top
R40 "120R" RESC0603X03L_C 110.698,59.117 r0 top
R41 "120R" RESC0603X03L_C 104.698,53.867 r0 top
R42 "120R" RESC0603X03L_C 110.698,53.867 r0 top
R43 "1M0" RESC0603X03L_C 107.574,58.599 r180 top
R44 "1M0" RESC0603X03L_C 106.456,58.599 r0 top
R45 "1M0" RESC0603X03L_C 107.563,53.349 r180 top
R46 "1M0" RESC0603X03L_C 106.445,53.349 r0 top
R47 "1M0" RESC0603X03L_C 100.825,35.774 r90 top
R48 "4k7" RESC0603X03L_C 101.403,30.571 r0 top
R49 "4k7" RESC0603X03L_C 101.403,31.384 r0 top
R50 "12k" RESC0603X03L_C 101.403,32.197 r0 top
R51 "12k" RESC0603X03L_C 104.68,29.911 r270 top
R52 "100k" RESC0603X03L_C 107.048,30.19 r90 top
R53 "18k" RESC0603X03L_C 106.114,29.58 r0 top
R54 "100k" RESC0603X03L_C 107.048,31.663 r90 top
R55 "18k" RESC0603X03L_C 106.114,31.054 r0 top
R56 "100k" RESC0603X03L_C 107.048,33.136 r90 top
R57 "18k" RESC0603X03L_C 106.114,32.527 r0 top
R58 "0R" RESC0603X03L_C 104.095,29.911 r270 top
R59 "N.C." RESC0603X03L_C_NC 103.511,29.911 r90 top
R60 "100k" RESC0603X03L_C 107.048,34.61 r90 top
R61 "18k" RESC0603X03L_C 106.114,34 r0 top
R62 "1M0" RESC0603X03L_C 92.95,19.699 r180 top
R63 "100k" RESC0603X03L_C 91.8,19.699 r0 top
R64 "100k" RESC0603X03L_C 18.825,25.699 r90 top
R65 "100k" RESC0603X03L_C 19.4,25.699 r90 top
R66 "1M0" RESC0603X03L_C 56.5,42.849 r180 top
R67 "1M0" RESC0603X03L_C 33.675,38.699 r270 top
R68 "1k87" RESC0603X03L_C 49.276,41.174 r90 top
R69 "1M0" RESC0603X03L_C 65.1,28.549 r180 top
R70 "5k1" RESC0603X03L_C 10.4,29.999 r180 top
R71 "5k1" RESC0603X03L_C 10.4,33.499 r180 top
R72 "1M0" RESC0603X03L_C 56.7,22.799 r270 top
R73 "1M0" RESC0603X03L_C 55.775,22.799 r90 top
R74 "47k" RESC0603X03L_C 14.825,21.699 r270 top
R75 "1M0" RESC0603X03L_C 14.325,23.499 r90 top
R76 "100k" RESC0603X03L_C 1.45,19.049 r90 top
R77 "10k" RESC0603X03L_C 1.45,17.949 r270 top
R78 "150k" RESC0603X03L_C 5,18.999 r270 top
R79 "10k" RESC0603X03L_C 1.45,14.699 r90 top
R80 "1M0" RESC0603X03L_C 1.45,15.799 r90 top
R81 "100k" RESC0603X03L_C 5,15.734 r90 top
R82 "N.C." RESC1005X04L_NC 16.51,47.318 r270 top
R83 "4k7" RESC0603X03L_C 12.337,18.216 r90 top
R84 "4k7" RESC0603X03L_C 11.737,18.216 r90 top
R85 "100k" RESC0603X03L_C 53.625,19.899 r270 top
R86 "100k" RESC0603X03L_C 48.875,17.824 r90 top
R87 "0R" RESC0603X03L_C 12.537,10.799 r0 top
SB3 "Solderbridge" Solderbridge_Shorted 73.66,48.999 r270 top net-tie
SB4 "Solderbridge" Solderbridge_Shorted 71.12,48.999 r270 top net-tie
SB5 "Solderbridge" Solderbridge_Shorted 50.8,14.499 r90 top net-tie
SB6 "Solderbridge" Solderbridge_Shorted 53.34,14.499 r90 top net-tie
SB7 "Solderbridge" Solderbridge_Shorted 68.58,48.999 r270 top net-tie
SB8 "Solderbridge" Solderbridge_Shorted 103.472,50.8 r0 top net-tie
SB9 "Solderbridge" Solderbridge_Shorted 55.88,14.499 r90 top net-tie
SB10 "Solderbridge" Solderbridge_Shorted 58.42,14.499 r90 top net-tie
SB11 "Solderbridge" Solderbridge 84,29.249 r0 top
SB12 "Solderbridge" Solderbridge 106,13.974 r180 top
SB13 "Solderbridge" Solderbridge 71.5,15.249 r180 top
SB14 "Solderbridge" Solderbridge_Shorted 71.5,13.249 r180 top net-tie
SB15 "Solderbridge" Solderbridge 9.75,57.249 r0 top
SB16 "Solderbridge" Solderbridge 9.75,59.094 r0 top
SB17 "Solderbridge" Solderbridge_Shorted 36.576,39.147 r90 top net-tie
SB18 "Solderbridge" Solderbridge_Shorted 67,27.749 r180 top net-tie
SB19 "Solderbridge" Solderbridge 67,26.249 r0 top
SB20 "Solderbridge" Solderbridge 73.66,42.204 r90 top
SB21 "Solderbridge" Solderbridge_Shorted 57.5,20.249 r270 top net-tie
SB22 "Solderbridge" Solderbridge 58.5,26.249 r270 top
SB23 "Solderbridge" Solderbridge_Shorted 57,26.249 r270 top net-tie
SB24 "Solderbridge" Solderbridge_Shorted 59,20.249 r270 top net-tie
SB25 "Solderbridge" Solderbridge_Shorted 56,31.98 r0 top net-tie
SB26 "Solderbridge" Solderbridge 56,30.48 r90 top
SB27 "Solderbridge" Solderbridge 56,24.249 r90 top
SB28 "Solderbridge" Solderbridge_Shorted 56,28.98 r0 top net-tie
SB29 "Solderbridge" Solderbridge 13.525,21.699 r270 top
SB30 "Solderbridge" Solderbridge_Shorted_Power 26.2,11.199 r90 top net-tie
SB31 "Solderbridge" Solderbridge_Shorted_Power 20.066,39.147 r180 top net-tie
SB32 "Solderbridge" Solderbridge_Shorted 24.6,12.399 r90 top net-tie
SB33 "Solderbridge" Solderbridge_Shorted_Power 24.6,11.199 r90 top net-tie
SB34 "Solderbridge" Solderbridge 15.24,47.318 r270 top
SB35 "Solderbridge" Solderbridge_Shorted_Power 4.1,10.799 r270 top net-tie
SW1 "PB SW" L-KLS7-TS6616B-2.5-160-T 117.64,12.999 r180 top
SW2 "PB SW" L-KLS7-TS6616B-2.5-160-T 128.29,12.999 r180 top
SW3 "PB SW" L-KLS7-TS6616B-2.5-160-T 117.64,3.999 r0 top
SW4 "PB SW" L-KLS7-TS6616B-2.5-160-T 128.29,3.999 r0 top
SW5 "PB SW" L-KLS7-TS6616B-2.5-160-T 21.136,3.999 r180 top
SW6 "Switch" JS102011JAQN 6.35,4.834 r0 top
TP1 "Ø1.0mm,SMD" TP_SMD_D1.0mm 129.5,32.099 r180 top
TP2 "Ø1.0mm,SMD" TP_SMD_D1.0mm 127.7,32.099 r180 top
TP3 "Ø1.5mm,SMD" TP_SMD_D1.5mm 33.02,19.049 r0 top
TP4 "Ø1.5mm,SMD" TP_SMD_D1.5mm 35.56,19.049 r0 top
TP5 "Ø1.5mm,SMD" TP_SMD_D1.5mm 33.02,16.509 r0 top
TP6 "Ø1.5mm,SMD" TP_SMD_D1.5mm 35.56,16.509 r0 top
TP7 "Ø1.5mm,SMD" TP_SMD_D1.5mm 43.18,19.049 r0 top
TP8 "Ø1.5mm,SMD" TP_SMD_D1.5mm 45.72,19.049 r0 top
TP9 "Ø1.5mm,SMD" TP_SMD_D1.5mm 43.18,16.509 r0 top
TP10 "Ø1.5mm,SMD" TP_SMD_D1.5mm 45.72,16.509 r0 top
TP11 "Ø1.5mm,SMD" TP_SMD_D1.5mm 23,21.749 r0 top
TP12 "Ø1.5mm,SMD" TP_SMD_D1.5mm 32.129,22.352 r90 bottom
TP13 "Ø1.5mm,SMD" TP_SMD_D1.5mm 36.957,24.765 r90 bottom
TP14 "Ø1.5mm,SMD" TP_SMD_D1.5mm 36.283,20.649 r90 bottom
TP15 "Ø1.5mm,SMD" TP_SMD_D1.5mm 36.83,29.528 r90 bottom
TP16 "Ø1.5mm,SMD" TP_SMD_D1.5mm 29.108,15.385 r90 bottom
TP17 "Ø1.5mm,SMD" TP_SMD_D1.5mm 6.248,36.323 r180 bottom
TP18 "Ø1.5mm,SMD" TP_SMD_D1.5mm 6.985,25.101 r180 bottom
TP19 "Ø1.5mm,SMD" TP_SMD_D1.5mm 11.074,33.275 r180 bottom
TP20 "Ø1.5mm,SMD" TP_SMD_D1.5mm 11.582,30.759 r180 bottom
TP21 "Ø1.5mm,SMD" TP_SMD_D1.5mm 19.85,10.249 r270 top
TP22 "Ø1.5mm,SMD" TP_SMD_D1.5mm 2.921,15.717 r90 bottom
TP23 "Ø1.5mm,SMD" TP_SMD_D1.5mm 24.795,21.379 r90 bottom
TP24 "TP" TESTPAD-TH 98,59.999 r0 top
TP25 "Ø1.5mm,SMD" TP_SMD_D1.5mm 8.3,13.699 r270 bottom
TP26 "Ø1.5mm,SMD" TP_SMD_D1.5mm 8.44,16.509 r270 bottom
TP27 "Ø1.5mm,SMD" TP_SMD_D1.5mm 6.604,9.398 r270 bottom
U1 "ECMF02-4CMX8" UFDFN50P120X250X55-8N 11.6,32.199 r0 top
U3 "nRF5340-QKAA" AQFN40P700X700X85_HS-99N 24.925,28.458 r0 top
U4 "GD25WB256E" SON127P800X80_HS-9N 79.187,38.399 r90 top
U5 "PCAL6408A" XQFN40P180X260X50-16N 103.41,32.349 r180 top
U6 "MFFx_M2M_UICC" SON127P600X90_HS-8N 76,14.249 r0 top value="M2M UICC"
U7_S1 "FSA2466UMX" XQFN40P180X260X50-16N 64.8,44.649 r270 top (schematic designator U7)
U7_S2 "FSA2466UMX" XQFN40P180X260X50-16N 51.4,18.499 r270 top (schematic designator U7)
U7_S3 "FSA2466UMX" XQFN40P180X260X50-16N 16.6,27.449 r180 top (schematic designator U7)
U7_S4 "FSA2466UMX" XQFN40P180X260X50-16N 29.9,38.049 r90 top (schematic designator U7)
U7_S5 "FSA2466UMX" XQFN40P180X260X50-16N 103.41,36.208 r0 top (schematic designator U7)
U7_S6 "FSA2466UMX" XQFN40P180X260X50-16N 103.41,27.483 r180 top (schematic designator U7)
U7_S8 "FSA2466UMX" XQFN40P180X260X50-16N 85.2,36.874 r180 top (schematic designator U7)
U7_S10 "FSA2466UMX" XQFN40P180X260X50-16N 58.5,23.249 r0 top (schematic designator U7)
U7_S11 "FSA2466UMX" XQFN40P180X260X50-16N 56.418,44.649 r270 top (schematic designator U7)
U8_S7 "NX3DV2567" XQFN40P180X260X50-16N 99,32.349 r180 top (schematic designator U8)
U8_S9 "NX3DV2567" XQFN40P180X260X50-16N 88.1,18.049 r0 top (schematic designator U8)
U9 "nPM1300-QEAA" Nordic_QFN50P500X500X90-33N 12.525,14.174 r180 top
X1 "32MHz" BT-XTAL_2016 32.05,32.312 r90 top
Y1 "Shunt 2.54mm" Shunt_2.54mm_Horizontal 3.485,49.858 r270 top
Y2 "Shunt 2.54mm" Shunt_2.54mm_Horizontal 103.41,3.493 r0 top

## Footprints (in the part's own frame and the unit in brackets; to place one, negate y for a bottom-side part, rotate by r counter-clockwise, add the part's x,y. Pads: shape width x height; smd on the part's side, far side on the other; paste and mask are expansions set on the pad)
AQFN40P700X700X85_HS-99N [mm] "AQFN, 98-Leads, Body 7.00x7.00mm, Pitch 0.40mm, Thermal Pad 5.4x5.0mm, IPC Medium Density"
  rect 5.4x5 smd paste-5 mask+0.05: 104(0.2,0)
  round 0.4 smd paste+0.012 mask+0.05: A1(-3.2,3.2) A31(3.2,3.2) AL1(-3.2,-3.2) AL31(3.2,-3.2)
  round 0.225 smd paste+0.012 mask+0.05: A5(-2.2,3.2) A13(-0.6,3.2) A15(-0.2,3.2) A17(0.2,3.2) A19(0.6,3.2) A21(1,3.2) A23(1.4,3.2) A25(1.8,3.2) A27(2.2,3.2) AA1(-3.2,-1) AA31(3.2,-1) AB2(-2.8,-1.2) AC1(-3.2,-1.4) AC31(3.2,-1.4) AD2(-2.8,-1.6) AE1(-3.2,-1.8) AE31(3.2,-1.8) AF2(-2.8,-2) AG1(-3.2,-2.2) AG31(3.2,-2.2) AH2(-2.8,-2.4) AJ1(-3.2,-2.6) AJ31(3.2,-2.6) AK2(-2.8,-2.8) AK4(-2.4,-2.8) AK6(-2,-2.8) AK8(-1.6,-2.8) AK10(-1.2,-2.8) AK12(-0.8,-2.8) AK14(-0.4,-2.8) AK16(0,-2.8) AK18(0.4,-2.8) AK20(0.8,-2.8) AK22(1.2,-2.8) AK24(1.6,-2.8) AK26(2,-2.8) AK28(2.4,-2.8) AK30(2.8,-2.8) AL3(-2.6,-3.2) AL5(-2.2,-3.2) AL7(-1.8,-3.2) AL9(-1.4,-3.2) AL11(-1,-3.2) AL13(-0.6,-3.2) AL15(-0.2,-3.2) AL17(0.2,-3.2) AL19(0.6,-3.2) AL21(1,-3.2) AL23(1.4,-3.2) AL25(1.8,-3.2) AL27(2.2,-3.2) AL29(2.6,-3.2) B2(-2.8,2.8) B4(-2.4,2.8) B6(-2,2.8) B8(-1.6,2.8) B10(-1.2,2.8) B12(-0.8,2.8) B14(-0.4,2.8) B16(0,2.8) B18(0.4,2.8) B20(0.8,2.8) B22(1.2,2.8) B24(1.6,2.8) B26(2,2.8) B28(2.4,2.8) B30(2.8,2.8) C1(-3.2,2.6) C31(3.2,2.6) D2(-2.8,2.4) E1(-3.2,2.2) E31(3.2,2.2) F2(-2.8,2) G1(-3.2,1.8) G31(3.2,1.8) H2(-2.8,1.6) J1(-3.2,1.4) J31(3.2,1.4) K2(-2.8,1.2) L1(-3.2,1) L31(3.2,1) M2(-2.8,0.8) N1(-3.2,0.6) N31(3.2,0.6) P2(-2.8,0.4) R1(-3.2,0.2) R31(3.2,0.2) T2(-2.8,0) U1(-3.2,-0.2) U31(3.2,-0.2) V2(-2.8,-0.4) W1(-3.2,-0.6) W31(3.2,-0.6) Y2(-2.8,-0.8)
  rrect15% 1.1x1 on Top Paste: ""(-1.75,-1.8) ""(-1.75,-0.6) ""(-1.75,0.6) ""(-1.75,1.8) ""(-0.45,-1.8) ""(-0.45,-0.6) ""(-0.45,0.6) ""(-0.45,1.8) ""(0.85,-1.8) ""(0.85,-0.6) ""(0.85,0.6) ""(0.85,1.8) ""(2.15,-1.8) ""(2.15,-0.6) ""(2.15,0.6) ""(2.15,1.8)
  silkscreen extent -4.22,3.23 -3.97,3.47, body extent -3.5,-3.5 3.5,3.5, height 0.85
BT-XTAL_2016 [mm] "Crystal 2.0 x 1.6 mm"
  rect 0.95x0.85 smd: 1(-0.725,-0.575) 2(0.725,-0.575) 3(0.725,0.575) 4(-0.725,0.575)
  body extent -1.05,-0.85 1.05,0.85, height 0.56
CAPC0603X03L_C [mm] "Chip Capacitor, 2-Leads, Body 0.6x0.3mm, IPC High Density"
  rect 0.27x0.3 smd mask+0.05: 1(-0.285,0) 2(0.285,0)
  body extent -0.3,-0.15 0.31,0.15, height 0.3
CAPC0603X03L_C_NC [mm] "Chip Capacitor, 2-Leads, Body 0.6x0.3mm, IPC High Density"
  rect 0.27x0.3 smd mask+0.05: 1(-0.285,0) 2(0.285,0)
CAPC1005X04L [mm] "Chip Capacitor, 2-Leads, Body 1.0x0.5mm, IPC High Density"
  rect 0.6x0.5 smd: 1(-0.5,0) 2(0.5,0)
  body extent -0.51,-0.25 0.51,0.25, height 0.5
CAPC1608X06L [mm] "Chip Capacitor, 2-Leads, Body 1.6x0.8mm, IPC High Density"
  rect 0.75x0.8 smd: 1(-0.675,0) 2(0.675,0)
  silkscreen extent -1.17,-0.5 1.17,0.5, body extent -0.8,-0.43 0.8,0.43, height 0.8
CAPC1608X06L_NC [mm] "Chip Capacitor, 2-Leads, Body 1.6x0.8mm, IPC High Density"
  rect 0.75x0.8 smd: 1(-0.675,0) 2(0.675,0)
  silkscreen extent -1.17,-0.5 1.17,0.5
CONSMA024-G [mm]
  rect 1x1.5 smd: 1(0,-4.9)
  rect 1.15x6.85 smd: 2(-4.175,-0.125) 2(4.175,-0.125)
  oval 0.7x7.2 hole 0.5 slot 7.1 at 90 deg: 2(-3.35,0) 2(3.35,0)
  Multi-Layer region: -3.498,-4.098 -3.498,3.3 -4.9,3.3 -4.9,-4.098
  Multi-Layer region: 4.9,-4.098 4.9,3.3 3.498,3.3 3.498,-4.098
  body extent -4.5,-5.5 4.5,9.5, height 4
DFN65P100X40-3L [mm] "DFN, 3-Leads, Body 0.60x1.00mm, Pitch 0.65mm, IPC High Density"
  rect 0.4x0.25 smd mask+0.05: 1(-0.35,0.225) 2(-0.35,-0.225)
  rect 0.4x0.7 smd mask+0.065: 3(0.35,0)
  body extent -0.53,-0.33 0.53,0.33, height 0.4
DFN65P200X200X80_HS-6N [mm] "DFN, 6-Leads, Body 2.00x2.00mm, Pitch 0.65mm, IPC Medium Density"
  rect 0.45x0.42 smd mask+0.055: 1(-0.905,0.65) 2(-0.905,0) 3(-0.905,-0.65) 4(0.905,-0.65) 5(0.905,0) 6(0.905,0.65)
  rect 0.92x0.71 smd mask+0.055: 3(0,-0.475) 6(0,0.475)
  body extent -1.05,-1.05 1.05,1.05, height 0.65
Fiducial [mm] "Fiducial Mark"
  round 1 smd far side paste+0 mask+0.5: 0(0,0)
  round 1 smd paste+0 mask+0.5: 0(0,0)
  Top Layer keep-out circle w0.01: c0,0 r1
  Bottom Layer keep-out circle w0.01: c0,0 r1
HDR_2x3-SMD [mil] "Board-Board Conn, Header, 6-way, 2-row"
  rect 40x113 smd: 1(-100,-100) 2(-100,100) 3(0,-100) 4(0,100) 5(100,-100) 6(100,100)
  silkscreen extent -160,-140 150,100, body extent -150,-148 150,148, height 382
HDR_2x5-SMD-1.27mm [mm] "Pin Header, 1.27mm SMD"
  rect 0.76x2.4 smd: 1(-2.54,-1.95) 2(-2.54,1.95) 3(-1.27,-1.95) 4(-1.27,1.95) 5(0,-1.95) 6(0,1.95) 7(1.27,-1.95) 8(1.27,1.95) 9(2.54,-1.95) 10(2.54,1.95)
  silkscreen extent -3.17,-0.35 3.17,0.35, body extent -3.16,-2.92 3.19,2.92, height 5.96
HDR_2x5-SMD-1.27mm-K [mm] "SMT MICRO HEADER, (1,27) .050\" Keying Shroud"
  rect 0.76x2.4 smd: 1(-2.54,-1.95) 2(-2.54,1.95) 3(-1.27,-1.95) 4(-1.27,1.95) 5(0,-1.95) 6(0,1.95) 7(1.27,-1.95) 8(1.27,1.95) 9(2.54,-1.95) 10(2.54,1.95)
  silkscreen extent -3.17,-0.35 3.17,0.35, body extent -3.14,-2.92 3.14,2.92, height 6.11
HDR_2x6-NC [mm] "Pin Header, 2.54mm through hole"
  rect 1.5x1.5 hole 0.9: 1(-6.35,-1.27)
  round 1.5 hole 0.9: 2(-6.35,1.27) 3(-3.81,-1.27) 4(-3.81,1.27) 5(-1.27,-1.27) 6(-1.27,1.27) 7(1.27,-1.27) 8(1.27,1.27) 9(3.81,-1.27) 10(3.81,1.27) 11(6.35,-1.27) 12(6.35,1.27)
  silkscreen extent -7.62,-2.41 7.62,2.54
HDR_2x8-NC [mm] "Pin Header, 2.54mm through hole"
  rect 1.5x1.5 hole 0.9: 1(-8.89,-1.27)
  round 1.5 hole 0.9: 2(-8.89,1.27) 3(-6.35,-1.27) 4(-6.35,1.27) 5(-3.81,-1.27) 6(-3.81,1.27) 7(-1.27,-1.27) 8(-1.27,1.27) 9(1.27,-1.27) 10(1.27,1.27) 11(3.81,-1.27) 12(3.81,1.27) 13(6.35,-1.27) 14(6.35,1.27) 15(8.89,-1.27) 16(8.89,1.27)
  silkscreen extent -10.16,-2.41 10.16,2.54
HDR_2x10-NC [mm] "Pin Header, 2.54mm through hole"
  rect 1.5x1.5 hole 0.9: 1(-11.43,-1.27)
  round 1.5 hole 0.9: 2(-11.43,1.27) 3(-8.89,-1.27) 4(-8.89,1.27) 5(-6.35,-1.27) 6(-6.35,1.27) 7(-3.81,-1.27) 8(-3.81,1.27) 9(-1.27,-1.27) 10(-1.27,1.27) 11(1.27,-1.27) 12(1.27,1.27) 13(3.81,-1.27) 14(3.81,1.27) 15(6.35,-1.27) 16(6.35,1.27) 17(8.89,-1.27) 18(8.89,1.27) 19(11.43,-1.27) 20(11.43,1.27)
  silkscreen extent -12.7,-2.41 12.7,2.54
HDR_2x10-SMD-1.27mm-K-SWD [mm] "SMT MICRO HEADER, (1,27) .050\" Keying Shroud w/ pin 7 removed"
  rect 0.76x2.4 smd: 1(-5.715,-1.95) 2(-5.715,1.95) 3(-4.445,-1.95) 4(-4.445,1.95) 5(-3.175,-1.95) 6(-3.175,1.95) 8(-1.905,1.95) 9(-0.635,-1.95) 10(-0.635,1.95) 11(0.635,-1.95) 12(0.635,1.95) 13(1.905,-1.95) 14(1.905,1.95) 15(3.175,-1.95) 16(3.175,1.95) 17(4.445,-1.95) 18(4.445,1.95) 19(5.715,-1.95) 20(5.715,1.95)
  silkscreen extent -6.35,-3.15 6.35,0.35, body extent -6.35,-2.92 6.35,2.92, height 6.11
INDC0603X03L_C [mm] "Chip Inductor, 2-Leads, Body 0.6x0.3mm, IPC High Density"
  rect 0.27x0.3 smd: 1(-0.285,0) 2(0.285,0)
  body extent -0.3,-0.15 0.3,0.15, height 0.3
INDC1005X04L_NC [mm] "Chip Inductor, 2-Leads, Body 1.0x0.5mm, IPC High Density"
  rect 0.65x0.5 smd: 1(-0.475,0) 2(0.475,0)
INDC1005X04L_WW [mm] "Chip Inductor, 2-Leads, Body 1.0x0.5mm, IPC High Density"
  rect 0.65x0.5 smd: 1(-0.475,0) 2(0.475,0)
  body extent -0.5,-0.3 0.5,0.3, height 0.51
INDC1608X06L [mm] "Chip Inductor, 2-Leads, Body 1.6x0.8mm, IPC High Density"
  rect 0.75x0.8 smd: 1(-0.675,0) 2(0.675,0)
  silkscreen extent -1.17,-0.5 1.17,0.5, body extent -0.8,-0.48 0.8,0.48, height 0.8
INDC2016X10N [mm] "Chip Inductor, 2-Leads, Body 2.00x1.60mm, IPC Medium Density"
  rect 1.13x1.82 smd: 1(-0.885,0) 2(0.885,0)
  body extent -1.1,-0.9 1.1,0.9, height 1
JS102011JAQN [mm] "Slide Switches - DPDT, SMD, ON-ON"
  round 0.9 hole 0.9 unplated mask+0: 0(-3.4,0) 0(3.4,0)
  rect 0.5x0.5 smd: 1(-2.5,-1.2) 3(2.5,-1.2) 4(-2.5,1.2) 6(2.5,1.2)
  rect 1x1.6 smd: 2(0,-1.2) 5(0,1.2)
  Top Layer region: -3,0.562 -2.838,0.4 -2,0.4 -2,2 -3,2
  Top Layer region: -3,-0.562 -2.838,-0.4 -2,-0.4 -2,-2 -3,-2
  Top Layer region: 3,0.562 2.838,0.4 2,0.4 2,2 3,2
  Top Layer region: 3,-0.562 2.838,-0.4 2,-0.4 2,-2 3,-2
  silkscreen extent -4.5,-3.8 4.5,1.75, body extent -4.25,-3.75 4.25,1.75, height 3.5
KLS1-SIM-066 [mm]
  rect 0.7x2.1 smd: 0(-1.67,-13.55) 0(-1.67,-1.55) 0(11.32,-13.55) 0(11.32,-1.55)
  rect 0.75x1.2 smd: C1(5.08,0) C2(2.54,0) C3(0,0) C5(6.35,0) C6(3.81,0) C7(1.27,0)
  rect 0.65x1.2 smd: CD(7.3,0)
  round 0.75 hole 0.75 unplated: ""(-0.17,-12.3) ""(8.33,-12.3)
  Top Layer keep-out region: 6.83,-13.4 5.63,-13.4 5.63,-9.6 6.83,-9.6
  Top Layer keep-out region: 4.29,-13.4 3.09,-13.4 3.09,-9.6 4.29,-9.6
  Top Layer keep-out region: 1.75,-13.4 0.55,-13.4 0.55,-9.6 1.75,-9.6
  Top Layer keep-out region: 6.83,-6.5 5.63,-6.5 5.63,-2.7 6.83,-2.7
  Top Layer keep-out region: 4.29,-6.5 3.09,-6.5 3.09,-2.7 4.29,-2.7
  Top Layer keep-out region: 1.75,-6.5 0.55,-6.5 0.55,-2.7 1.75,-2.7
  silkscreen extent -1.38,-14.3 11.02,-0.7, body extent -1.72,-14.49 11.37,0.09, height 1.44
L-KLS7-TS6616B-2.5-160-T [mm] "6.2Ã—6.4mm TACT Switch, without ground connector"
  rect 2.75x1.4 smd: 1(-3.025,2) 1(3.025,2) 2(-3.025,-2) 2(3.025,-2)
  silkscreen extent -3,-3 3,3, body extent -3.6,-3.1 3.6,3.1, height 2.5
LabelSilk_15x40 [mm] "PCA version label, stick-on, 15x40mm"
  silkscreen extent 0,0 40,15, body extent 0,0 40,15, height 0.05
LED_0603_G [mil] "SMD Super Bright LED, GREEN"
  rect 30x32 smd: 1(-27.5,0) 2(27.5,0)
  silkscreen extent -58,-10 -58,10, body extent -32,-16 32,16, height 24
LGA50P1210X1110X130-113N [mm]
  rect 0.7x0.45 smd paste-2539.97 mask-5: 1(-5,-5.625)
  rect 0.3x0.45 smd mask+0.05: 2(-4.25,-5.625) 3(-3.75,-5.625) 4(-3.25,-5.625) 5(-2.75,-5.625) 6(-2.25,-5.625) 7(-1.75,-5.625) 8(-1.25,-5.625) 9(-0.75,-5.625) 10(-0.25,-5.625) 11(0.25,-5.625) 12(0.75,-5.625) 13(1.25,-5.625) 14(1.75,-5.625) 15(2.25,-5.625) 16(2.75,-5.625) 17(3.25,-5.625) 18(3.75,-5.625) 19(4.25,-5.625) 42(4.25,5.625) 43(3.75,5.625) 44(3.25,5.625) 45(2.75,5.625) 46(2.25,5.625) 47(1.75,5.625) 48(1.25,5.625) 49(0.75,5.625) 50(0.25,5.625) 51(-0.25,5.625) 52(-0.75,5.625) 53(-1.25,5.625) 54(-1.75,5.625) 55(-2.25,5.625) 56(-2.75,5.625) 57(-3.25,5.625) 58(-3.75,5.625) 59(-4.25,5.625)
  rect 0.7x0.7 smd mask+0.05: 20(5,-5.5) 41(5,5.5) 60(-5,5.5)
  rect 0.45x0.3 smd mask+0.05: 21(5.125,-4.75) 22(5.125,-4.25) 23(5.125,-3.75) 24(5.125,-3.25) 25(5.125,-2.75) 26(5.125,-2.25) 27(5.125,-1.75) 28(5.125,-1.25) 29(5.125,-0.75) 30(5.125,-0.25) 31(5.125,0.25) 32(5.125,0.75) 33(5.125,1.25) 34(5.125,1.75) 35(5.125,2.25) 36(5.125,2.75) 37(5.125,3.25) 38(5.125,3.75) 39(5.125,4.25) 40(5.125,4.75) 61(-5.125,4.75) 62(-5.125,4.25) 63(-5.125,3.75) 64(-5.125,3.25) 65(-5.125,2.75) 66(-5.125,2.25) 67(-5.125,1.75) 68(-5.125,1.25) 69(-5.125,0.75) 70(-5.125,0.25) 71(-5.125,-0.25) 72(-5.125,-0.75) 73(-5.125,-1.25) 74(-5.125,-1.75) 75(-5.125,-2.25) 76(-5.125,-2.75) 77(-5.125,-3.25) 78(-5.125,-3.75) 79(-5.125,-4.25) 80(-5.125,-4.75)
  rect 0.3x0.3 smd mask+0.05: 81(-3.4,-4.1) 82(-2.85,-4.1) 83(-2.3,-4.1) 84(-0.55,-4.1) 85(0,-4.1) 86(0.55,-4.1) 87(2.3,-4.1) 88(2.85,-4.1) 89(3.4,-4.1) 90(2.15,-0.55) 91(2.15,0) 92(2.15,0.55) 93(3.4,4.1) 94(2.85,4.1) 95(2.3,4.1) 96(0.55,4.1) 97(0,4.1) 98(-0.55,4.1) 99(-2.3,4.1) 100(-2.85,4.1) 101(-3.4,4.1) 102(-2.15,0.55) 103(-2.15,0) 104(-2.15,-0.55)
  rect 1.6x1.6 smd mask+0.05: 105(-2.85,-2.85) 106(0,-2.85) 107(2.85,-2.85) 109(2.85,2.85) 110(0,2.85) 111(-2.85,2.85) 113(0,0)
  rect 1.95x1.6 smd mask+0.05: 108(3.575,0) 112(-3.575,0)
  Top Layer region: -5.35,-5.15 -5.35,-5.85 -4.65,-5.85 -4.65,-5.4 -4.9,-5.15
  silkscreen extent -5.99,-6.5 -5.69,-6.2, body extent -5.6,-6.1 5.6,6.1, height 1.21
LIST_1x6_SMD-NC [mm] "Pin List, 2.54mm, SMD"
  rect 1.02x2.19 smd: 1(0,-1.465) 1(0,1.465) 2(2.54,-1.465) 2(2.54,1.465) 3(5.08,-1.465) 3(5.08,1.465) 4(7.62,-1.465) 4(7.62,1.465) 5(10.16,-1.465) 5(10.16,1.465) 6(12.7,-1.465) 6(12.7,1.465)
  silkscreen extent -1.27,-1.27 13.97,1.27
LIST_1x8_SMD-NC [mm] "Pin List, 2.54mm, SMD"
  rect 1.02x2.19 smd: 1(0,-1.465) 1(0,1.465) 2(2.54,-1.465) 2(2.54,1.465) 3(5.08,-1.465) 3(5.08,1.465) 4(7.62,-1.465) 4(7.62,1.465) 5(10.16,-1.465) 5(10.16,1.465) 6(12.7,-1.465) 6(12.7,1.465) 7(15.24,-1.465) 7(15.24,1.465) 8(17.78,-1.465) 8(17.78,1.465)
  silkscreen extent -1.27,-1.27 19.05,1.27
LIST_1x10_SMD-NC [mm] "Pin List, 2.54mm, SMD"
  rect 1.02x2.19 smd: 1(0,-1.465) 1(0,1.465) 2(2.54,-1.465) 2(2.54,1.465) 3(5.08,-1.465) 3(5.08,1.465) 4(7.62,-1.465) 4(7.62,1.465) 5(10.16,-1.465) 5(10.16,1.465) 6(12.7,-1.465) 6(12.7,1.465) 7(15.24,-1.465) 7(15.24,1.465) 8(17.78,-1.465) 8(17.78,1.465) 9(20.32,-1.465) 9(20.32,1.465) 10(22.86,-1.465) 10(22.86,1.465)
  silkscreen extent -1.27,-1.27 24.13,1.27
LIST_1x13_SMD [mm] "Pin List, 2.54mm, SMD"
  rect 1.02x2.19 smd: 1(0,-1.465) 1(0,1.465) 2(2.54,-1.465) 2(2.54,1.465) 3(5.08,-1.465) 3(5.08,1.465) 4(7.62,-1.465) 4(7.62,1.465) 5(10.16,-1.465) 5(10.16,1.465) 6(12.7,-1.465) 6(12.7,1.465) 7(15.24,-1.465) 7(15.24,1.465) 8(17.78,-1.465) 8(17.78,1.465) 9(20.32,-1.465) 9(20.32,1.465) 10(22.86,-1.465) 10(22.86,1.465) 11(25.4,-1.465) 11(25.4,1.465) 12(27.94,-1.465) 12(27.94,1.465) 13(30.48,-1.465) 13(30.48,1.465)
  silkscreen extent -1.27,-1.27 31.75,1.27, body extent -1.27,-2.5 31.75,2.5, height 9.82
LIST_1x13_SMD-NC [mm] "Pin List, 2.54mm, SMD"
  rect 1.02x2.19 smd: 1(0,-1.465) 1(0,1.465) 2(2.54,-1.465) 2(2.54,1.465) 3(5.08,-1.465) 3(5.08,1.465) 4(7.62,-1.465) 4(7.62,1.465) 5(10.16,-1.465) 5(10.16,1.465) 6(12.7,-1.465) 6(12.7,1.465) 7(15.24,-1.465) 7(15.24,1.465) 8(17.78,-1.465) 8(17.78,1.465) 9(20.32,-1.465) 9(20.32,1.465) 10(22.86,-1.465) 10(22.86,1.465) 11(25.4,-1.465) 11(25.4,1.465) 12(27.94,-1.465) 12(27.94,1.465) 13(30.48,-1.465) 13(30.48,1.465)
  silkscreen extent -1.27,-1.27 31.75,1.27
LIST_ANG_1x2-SMD-2.54MM [mm] "Pin List, 2.54mm, Surface Mount, Angled"
  round 1.78 hole 1.78 unplated: 0(0,-4.496)
  rect 1.27x3.18 smd: 1(-1.27,0) 2(1.27,0)
  silkscreen extent -2.54,-11.58 2.54,-1.92, body extent -2.56,-11.61 2.52,1.35, height 3.03
LIST_ANG_1x4-SMD-2.54MM [mm] "Pin List, 2.54mm, Surface Mount, Angled"
  round 1.78 hole 1.78 unplated: 0(-2.54,-4.496) 0(2.54,-4.496)
  rect 1.27x3.18 smd: 1(-3.81,0) 2(-1.27,0) 3(1.27,0) 4(3.81,0)
  silkscreen extent -5.08,-11.58 5.08,-1.92, body extent -5.1,-11.61 5.06,1.35, height 3.03
LIST_ANG_1x6-SMD-2.54MM [mm] "Pin List, 2.54mm, Surface Mount, Angled"
  round 1.78 hole 1.78 unplated: 0(-5.08,-4.496) 0(5.08,-4.496)
  rect 1.27x3.18 smd: 1(-6.35,0) 2(-3.81,0) 3(-1.27,0) 4(1.27,0) 5(3.81,0) 6(6.35,0)
  silkscreen extent -6.6,-9.74 1.65,2.79, body extent -7.64,-11.61 7.6,1.35, height 3.03
Molex_502774-0891 [mm] "SD Micro, Molex 0473521001, Push-Push"
  rect 1.5x1.7 smd mask+0.05: 0(-0.75,14.77) 0(12.75,14.77)
  rect 1.6x1.5 smd mask+0.05: 0(-0.21,0)
  rect 1.7x1.5 smd mask+0.05: 0(12.45,0)
  rect 0.8x1.68 smd mask+0.05: 1(8.9,0.08) 2(7.8,0.08) 3(6.7,0.08) 4(5.6,0.08) 5(4.5,0.08) 6(3.4,0.08) 7(2.3,0.08) 8(1.2,0.08)
  rect 1.29x1.3 smd mask+0.05: 9(-0.96,1.6)
  rect 1.29x1.4 smd mask+0.05: 10(-0.96,8.97)
  silkscreen extent -1.2,0 13,15, body extent -1.2,-0.61 13.1,15.39, height 1.78
NORDIC_LOGO_LYING [mm]
  silkscreen extent -2.57,-2.24 13.7,2.24
Nordic_QFN50P500X500X90-33N [mm] "QFN32 5x5x0.85mm, 0.5mm pitch - Medium Density"
  oval 0.85x0.3 smd: 1(-2.45,1.75) 2(-2.45,1.25) 3(-2.45,0.75) 4(-2.45,0.25) 5(-2.45,-0.25) 6(-2.45,-0.75) 7(-2.45,-1.25) 8(-2.45,-1.75) 17(2.45,-1.75) 18(2.45,-1.25) 19(2.45,-0.75) 20(2.45,-0.25) 21(2.45,0.25) 22(2.45,0.75) 23(2.45,1.25) 24(2.45,1.75)
  oval 0.3x0.85 smd: 9(-1.75,-2.45) 10(-1.25,-2.45) 11(-0.75,-2.45) 12(-0.25,-2.45) 13(0.25,-2.45) 14(0.75,-2.45) 15(1.25,-2.45) 16(1.75,-2.45) 25(1.75,2.45) 26(1.25,2.45) 27(0.75,2.45) 28(0.25,2.45) 29(-0.25,2.45) 30(-0.75,2.45) 31(-1.25,2.45) 32(-1.75,2.45)
  rect 3.5x3.5 smd: 33(0,0)
  silkscreen extent -3.43,2.38 -3.18,2.62, body extent -2.5,-2.5 2.5,2.5, height 0.9
RESC0603X03L_C [mm] "Chip Resistor, 2-Leads, Body 0.6x0.3mm, IPC High Density"
  rect 0.27x0.3 smd: 1(-0.285,0) 2(0.285,0)
  body extent -0.3,-0.15 0.3,0.15, height 0.23
RESC0603X03L_C_NC [mm] "Chip Resistor, 2-Leads, Body 0.6x0.3mm, IPC High Density"
  rect 0.27x0.3 smd: 1(-0.285,0) 2(0.285,0)
RESC1005X04L_NC [mm] "Chip Resistor, 2-Leads, Body 1.0x0.5mm, IPC High Density"
  rect 0.6x0.55 smd mask+0.05: 1(-0.5,0) 2(0.5,0)
RESC2012X11L [mm] "Chip Resistor, 2-Leads, Body 2.0x1.3mm, IPC High Density"
  rect 1.15x1.35 smd: 1(-0.775,0) 2(0.775,0)
  silkscreen extent -1.45,-0.77 1.45,0.77, body extent -1,-0.62 1,0.63, height 0.5
SD-80259-001 [mm] "USB TYPE C RECEPTACLE, 16 PIN"
  round 0.6 hole 0.6 unplated: 0(-2.89,1.315) 0(2.89,1.315)
  rect 0.6x1.14 smd: A1(-3.2,2.385) A4(-2.4,2.385) A9(2.4,2.385) A12(3.2,2.385)
  rect 0.3x1.14 smd: A5(-1.25,2.385) A6(-0.25,2.385) A7(0.25,2.385) A8(1.25,2.385) B5(1.75,2.385) B6(0.75,2.385) B7(-0.75,2.385) B8(-1.75,2.385)
  oval 0.9x2 hole 0.6 slot 1.7 at 90 deg: SHLD(-4.325,1.795) SHLD(4.325,1.795)
  oval 0.9x1.7 hole 0.6 slot 1.4 at 90 deg: SHLD(-4.325,-2.385) SHLD(4.325,-2.385)
  oval 0.9x2 on Top Paste: ""(-4.32,1.795) ""(4.32,1.795)
  oval 0.9x1.7 on Top Paste: ""(-4.32,-2.385) ""(4.32,-2.385)
  silkscreen extent -4.33,-4.48 4.33,0.47, body extent -4.48,-4.98 4.48,2.74, height 3.26
SEGGER_LOGO_S [mm] "Logo 7.82 mm x 3.84 mm, print overlay"
  silkscreen extent -3.91,-1.92 3.91,1.92
Shunt_2.54mm_Horizontal [mm]
  body extent 0,-2.54 5.03,2.54, height 2.99